# EAGLE board Console_Block-Panel-v10 (EAGLE 6.6.0), part 1 of 4
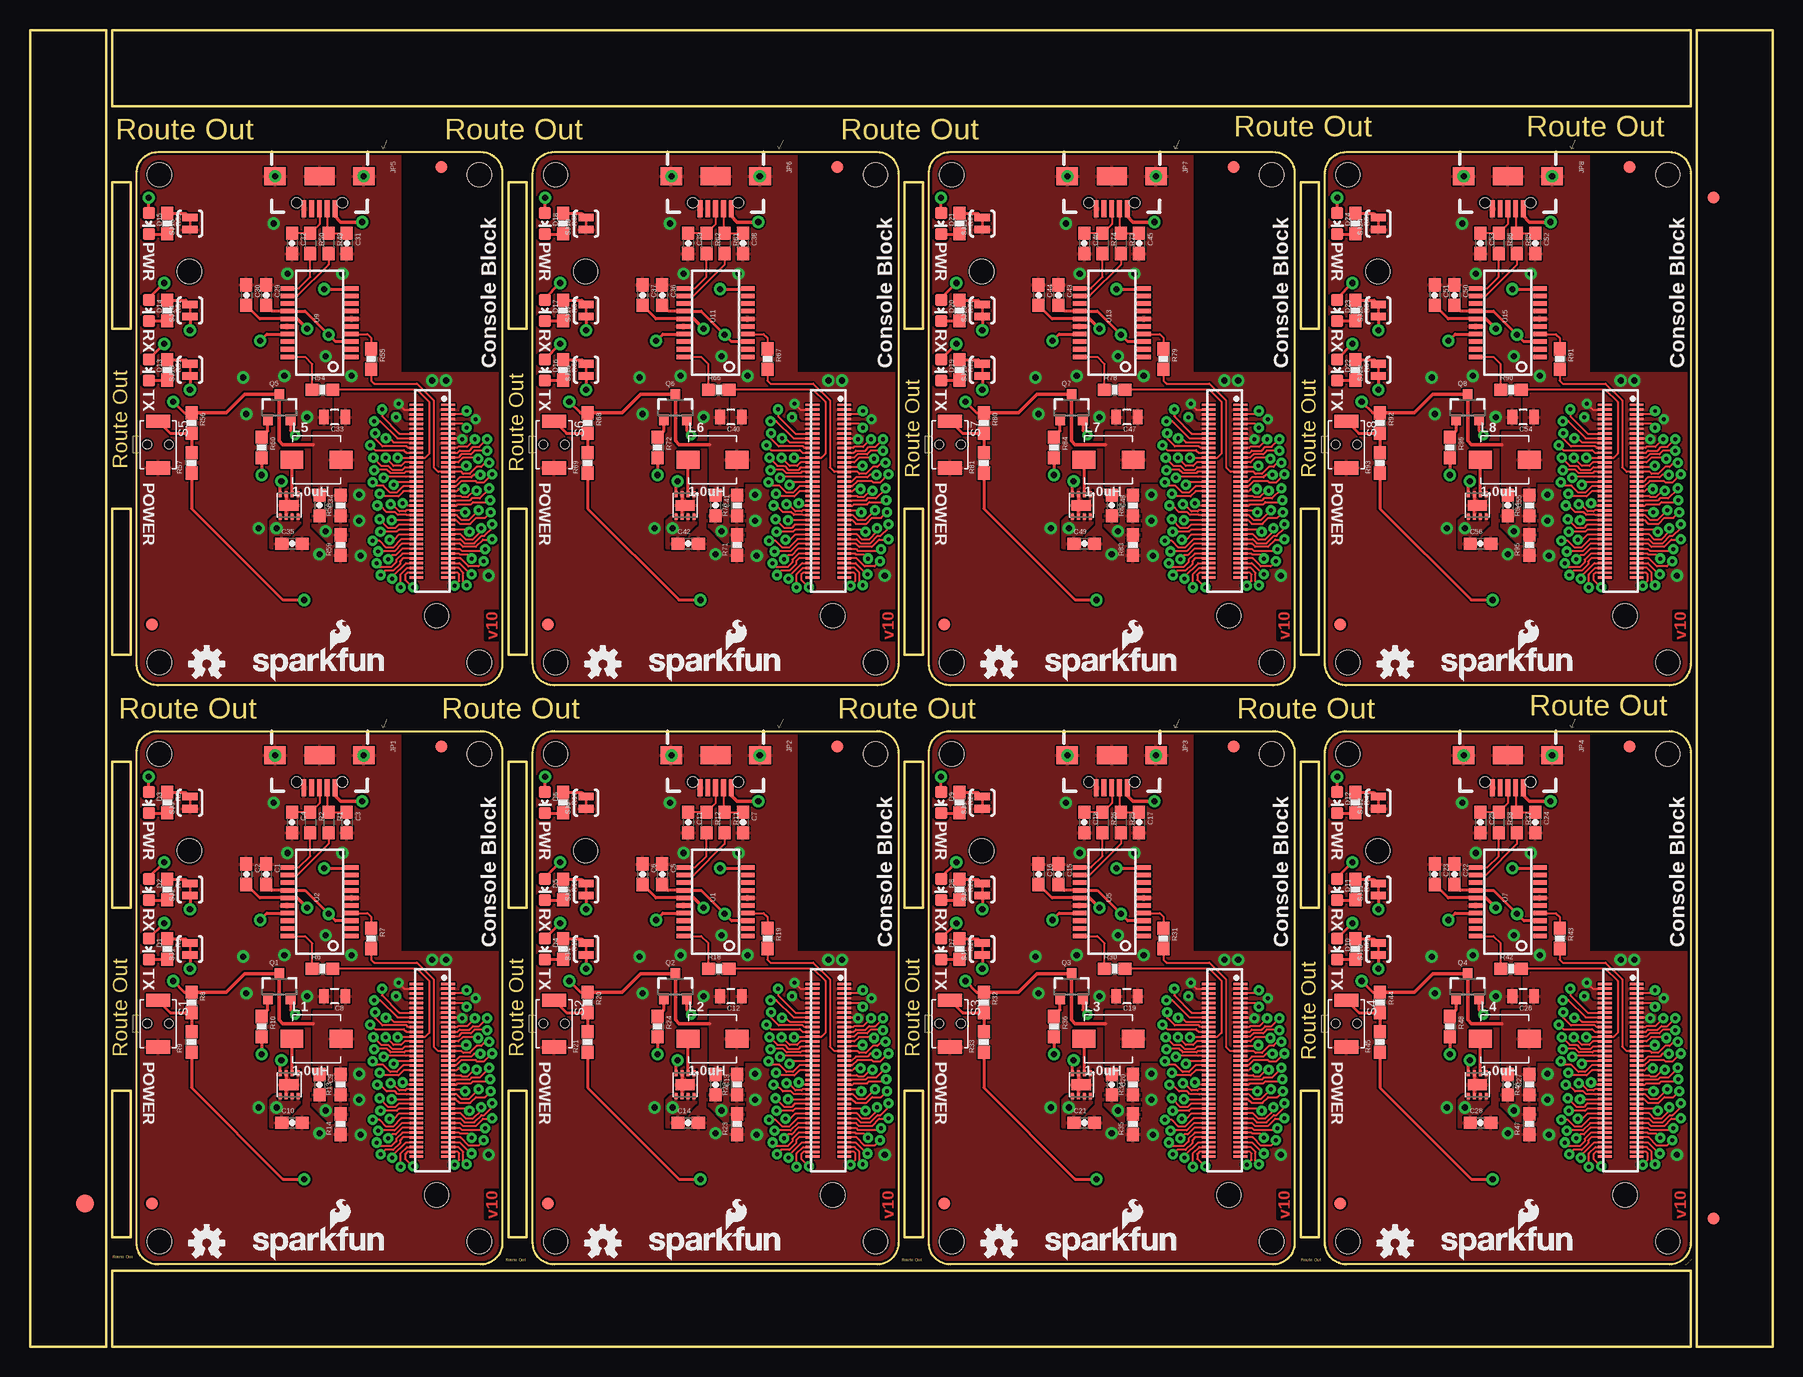
[diagram p0: board, top side]
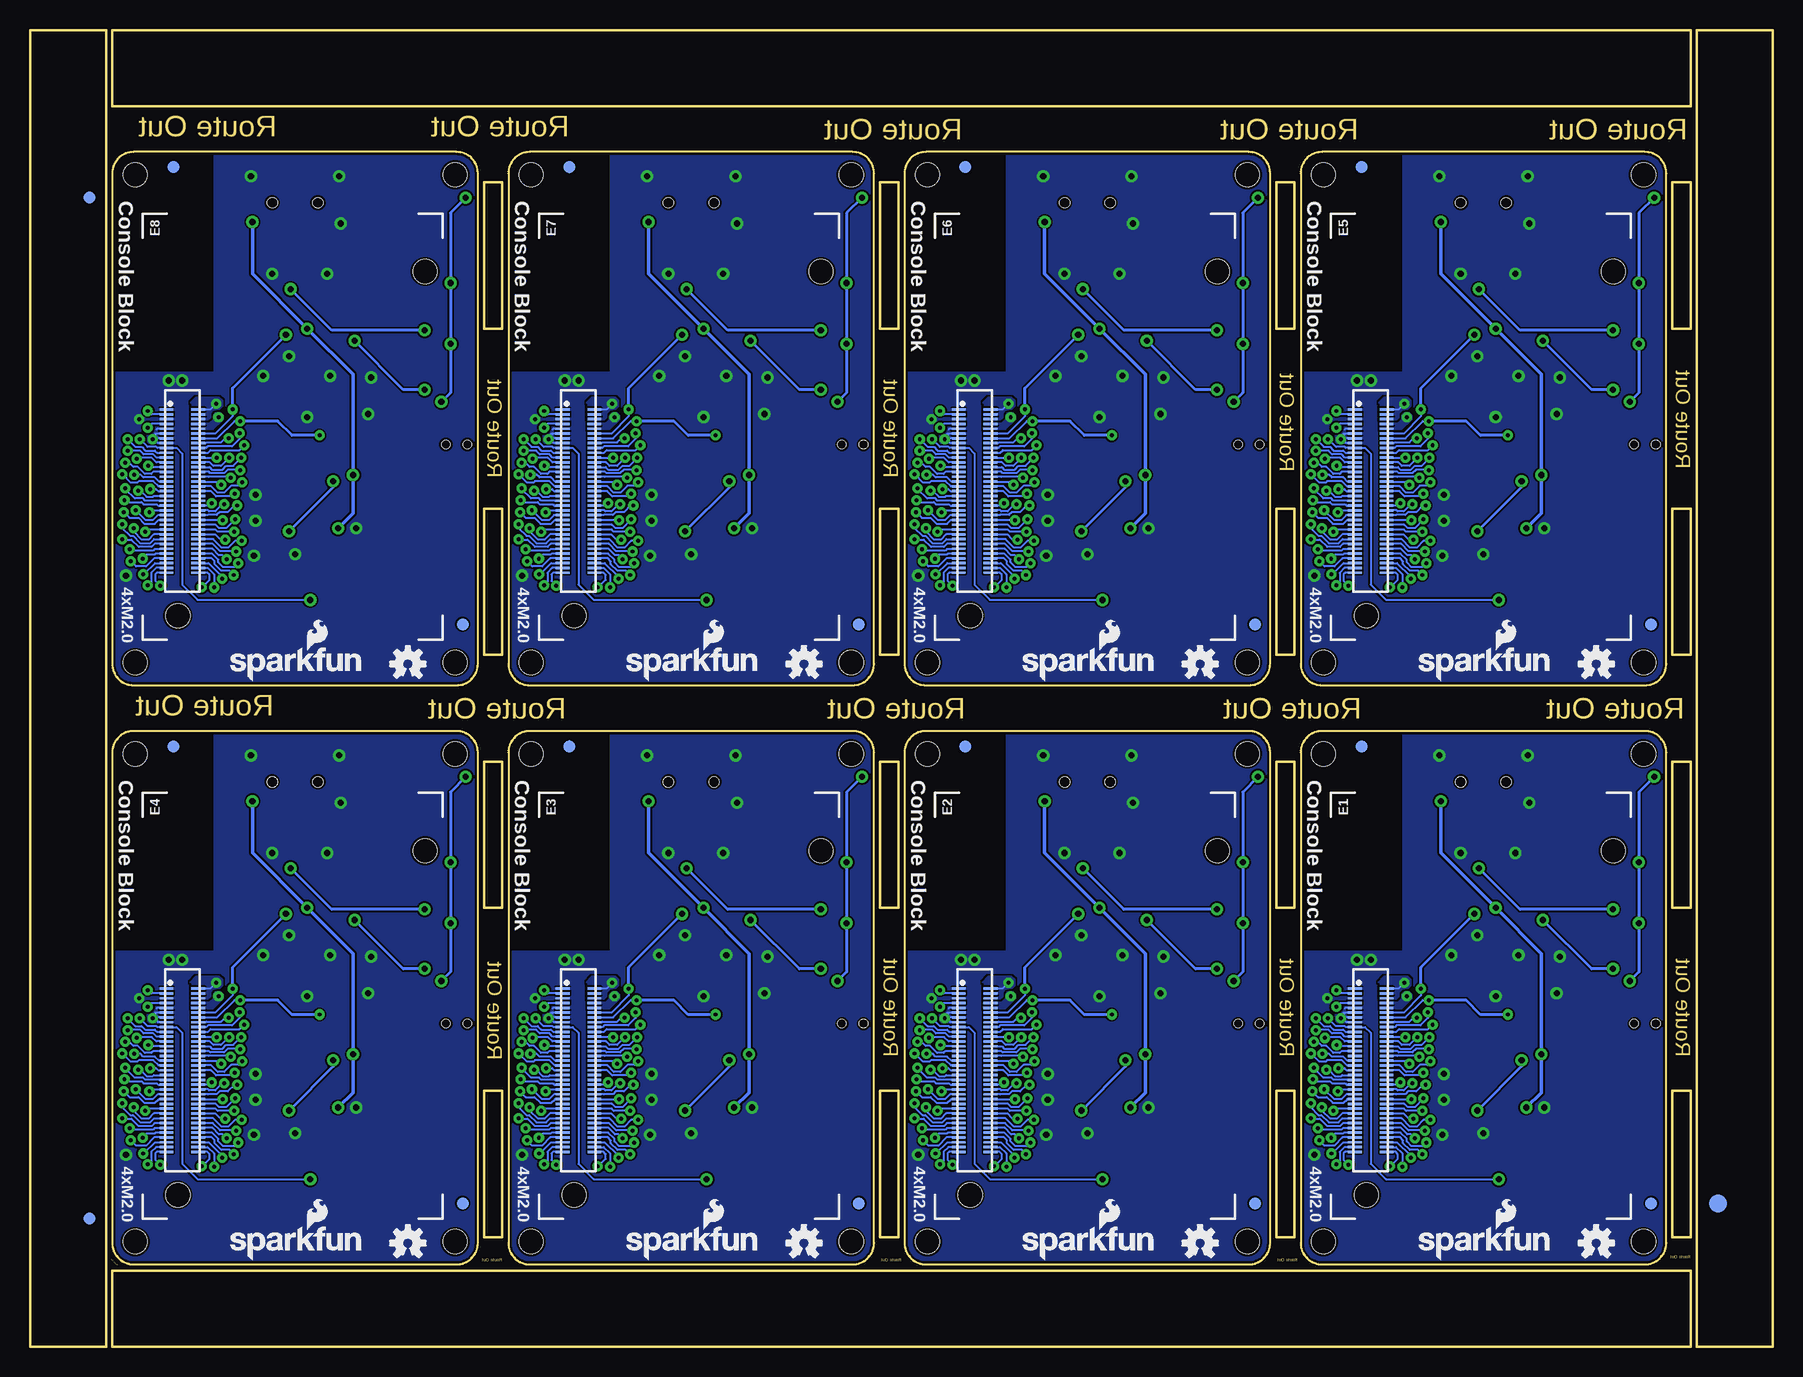
[diagram p1: board, bottom side, seen from below]

Size 145.29 x 109.73 mm. Coordinates in mm from the lower left corner, seen from the top.
Outline: 6.35,79.25 6.35,0 0,0 0,29.72
Outline: 145.29,79.25 145.29,0 138.94,0 138.94,29.72
Outline: 138.94,27.18 138.94,109.73 145.29,109.73 145.29,76.71
Outline: 0,27.18 0,109.73 6.35,109.73 6.35,76.71
Outline: 39.37,49.53 39.37,8.64 arc-90 37.59,6.86 10.67,6.86 arc-90 8.89,8.64 8.89,49.53 arc-90 10.67,51.31 37.59,51.31 arc-90 39.37,49.53
Outline: 72.39,49.53 72.39,8.64 arc-90 70.61,6.86 43.69,6.86 arc-90 41.91,8.64 41.91,49.53 arc-90 43.69,51.31 70.61,51.31 arc-90 72.39,49.53
Outline: 105.41,49.53 105.41,8.64 arc-90 103.63,6.86 76.71,6.86 arc-90 74.93,8.64 74.93,49.53 arc-90 76.71,51.31 103.63,51.31 arc-90 105.41,49.53
Outline: 138.43,49.53 138.43,8.64 arc-90 136.65,6.86 109.73,6.86 arc-90 107.95,8.64 107.95,49.53 arc-90 109.73,51.31 136.65,51.31 arc-90 138.43,49.53
Outline: 39.37,97.79 39.37,56.9 arc-90 37.59,55.12 10.67,55.12 arc-90 8.89,56.9 8.89,97.79 arc-90 10.67,99.57 37.59,99.57 arc-90 39.37,97.79
Outline: 72.39,97.79 72.39,56.9 arc-90 70.61,55.12 43.69,55.12 arc-90 41.91,56.9 41.91,97.79 arc-90 43.69,99.57 70.61,99.57 arc-90 72.39,97.79
Outline: 105.41,97.79 105.41,56.9 arc-90 103.63,55.12 76.71,55.12 arc-90 74.93,56.9 74.93,97.79 arc-90 76.71,99.57 103.63,99.57 arc-90 105.41,97.79
Outline: 138.43,97.79 138.43,56.9 arc-90 136.65,55.12 109.73,55.12 arc-90 107.95,56.9 107.95,97.79 arc-90 109.73,99.57 136.65,99.57 arc-90 138.43,97.79
Outline: 6.86,0 138.43,0 138.43,6.35 6.86,6.35 6.86,0
Outline: 138.43,109.73 6.86,109.73 6.86,103.38 138.43,103.38 138.43,109.73
Outline: 8.38,9.14 8.38,21.34 6.86,21.34 6.86,9.14 8.38,9.14
Outline: 6.86,48.77 6.86,36.58 8.38,36.58 8.38,48.77 6.86,48.77
Outline: 41.4,9.14 41.4,21.34 39.88,21.34 39.88,9.14 41.4,9.14
Outline: 74.42,9.14 74.42,21.34 72.9,21.34 72.9,9.14 74.42,9.14
Outline: 107.44,9.14 107.44,21.34 105.92,21.34 105.92,9.14 107.44,9.14
Outline: 105.92,48.77 105.92,36.58 107.44,36.58 107.44,48.77 105.92,48.77
Outline: 72.9,48.77 72.9,36.58 74.42,36.58 74.42,48.77 72.9,48.77
Outline: 39.88,48.77 39.88,36.58 41.4,36.58 41.4,48.77 39.88,48.77
Outline: 8.38,57.66 8.38,69.85 6.86,69.85 6.86,57.66 8.38,57.66
Outline: 41.4,57.66 41.4,69.85 39.88,69.85 39.88,57.66 41.4,57.66
Outline: 74.42,57.66 74.42,69.85 72.9,69.85 72.9,57.66 74.42,57.66
Outline: 107.44,57.66 107.44,69.85 105.92,69.85 105.92,57.66 107.44,57.66
Outline: 105.92,97.03 105.92,84.84 107.44,84.84 107.44,97.03 105.92,97.03
Outline: 72.9,97.03 72.9,84.84 74.42,84.84 74.42,97.03 72.9,97.03
Outline: 39.88,97.03 39.88,84.84 41.4,84.84 41.4,97.03 39.88,97.03
Outline: 6.86,97.03 6.86,84.84 8.38,84.84 8.38,97.03 6.86,97.03
Copper layers (1*16): Top 0.035mm / dielectric 1.5mm / Bottom 0.035mm
Design rules "SparkFun-2-layer *": minimum track width 6mil, minimum drill 13mil, track to track 6mil, track to pad 6mil, pad to pad 6mil, via to via 6mil, smd to smd 6mil, copper to edge 8mil, drill to drill 8mil, minimum pad ring 12mil, minimum via ring 10mil, stop-mask expansion 4mil, vias tented up to drill 20mil, thermal gap 6mil
Holes 2 mm at 37.47,8.76 10.79,8.76 10.79,49.4 37.47,49.4 70.48,8.76 43.81,8.76 43.81,49.4 70.48,49.4 103.5,8.76 76.83,8.76 76.83,49.4 103.5,49.4 136.53,8.76 109.86,8.76 109.86,49.4 136.53,49.4 37.47,57.02 10.79,57.02 10.79,97.66 37.47,97.66 70.48,57.02 43.81,57.02 43.81,97.66 70.48,97.66 103.5,57.02 76.83,57.02 76.83,97.66 103.5,97.66 136.53,57.02 109.86,57.02 109.86,97.66 136.53,97.66
tRestrict: area 31,33 to 39.4,51.3; area 64,33 to 72.4,51.3; area 97,33 to 105.4,51.3; area 130,33 to 138.4,51.3; area 31,81.3 to 39.4,99.6; area 64,81.3 to 72.4,99.6; area 97,81.3 to 105.4,99.6; area 130,81.3 to 138.4,99.6; 32 lines
bRestrict: area 31,33 to 39.4,51.3; area 64,33 to 72.4,51.3; area 97,33 to 105.4,51.3; area 130,33 to 138.4,51.3; area 31,81.3 to 39.4,99.6; area 64,81.3 to 72.4,99.6; area 97,81.3 to 105.4,99.6; area 130,81.3 to 138.4,99.6; 16 lines

## Footprints (pad centres in the part's own frame; a part is rotated, then mirrored left to right if it is on the bottom)
0603-CAP = smd 1.1 x 1: 1 -0.85,0; 2 0.85,0
0805 = smd 0.8 x 1.2: 1 -0.9,0; 2 0.9,0
LED-0603 = smd 1 x 1: A 0,-0.877; C 0,0.877
EDISON_DAUGHTER = smd 1.14 x 0.2: 1 1.98,19.17; 2 4.62,19.17; 3 1.98,18.77; 4 4.62,18.77; 5 1.98,18.37; 6 4.62,18.37; 7 1.98,17.97; 8 4.62,17.97; 9 1.98,17.57; 10 4.62,17.57; 11 1.98,17.17; 12 4.62,17.17; 13 1.98,16.77; 14 4.62,16.77; 15 1.98,16.37; 16 4.62,16.37; 17 1.98,15.97; 18 4.62,15.97; 19 1.98,15.57; 20 4.62,15.57; 21 1.98,15.17; 22 4.62,15.17; 23 1.98,14.77; 24 4.62,14.77; 25 1.98,14.37; 26 4.62,14.37; 27 1.98,13.97; 28 4.62,13.97; 29 1.98,13.57; 30 4.62,13.57; 31 1.98,13.17; 32 4.62,13.17; 33 1.98,12.77; 34 4.62,12.77; 35 1.98,12.37; 36 4.62,12.37; 37 1.98,11.97; 38 4.62,11.97; 39 1.98,11.57; 40 4.62,11.57; 41 1.98,11.17; 42 4.62,11.17; 43 1.98,10.77; 44 4.62,10.77; 45 1.98,10.37; 46 4.62,10.37; 47 1.98,9.97; 48 4.62,9.97; 49 1.98,9.57; 50 4.62,9.57; 51 1.98,9.17; 52 4.62,9.17; 53 1.98,8.77; 54 4.62,8.77; 55 1.98,8.37; 56 4.62,8.37; 57 1.98,7.97; 58 4.62,7.97; 59 1.98,7.57; 60 4.62,7.57; 61 1.98,7.17; 62 4.62,7.17; 63 1.98,6.77; 64 4.62,6.77; 65 1.98,6.37; 66 4.62,6.37; 67 1.98,5.97; 68 4.62,5.97; 69 1.98,5.57; 70 4.62,5.57 | hole 2: 23.53,30.67; 2.93,1.98
FIDUCIAL-1.5X3 = smd 1.5 x 1.5: 1 0,0
FIDUCIAL-1X2 = smd 1 x 1: 1 0,0
USB-B-MICRO-SMD_V03 = smd 1.4 x 0.4: D+1 2.7,0; D-1 2.7,0.65; GND1 2.7,-1.3; ID1 2.7,-0.65; VBUS1 2.7,1.3 | smd 1.5 x 1.8: SHIELD1 0,3.7; SHIELD2 0,-3.7 | smd 1.5 x 2.5: SHIELD3 0,0 | hole 0.85: 2.2,1.9; 2.2,-1.9
INDUCTOR-SRP4020 = smd 1.9 x 1.5: P$1 -2.05,0; P$2 2.05,0
SOT23-3 = smd 0.8 x 0.9: 1 -0.95,-1; 2 0.95,-1; 3 0,1.1
0603 = smd 1.1 x 1: 1 -0.85,0; 2 0.85,0
0603-RES = smd 1.1 x 1: 1 -0.85,0; 2 0.85,0
TACTILE_SWITCH-SMD-RIGHT-ANGLE = smd 1.1 x 2: 1 -1.95,0; 2 1.95,0 | hole 0.7: 0,0.9; 0,-0.9
PAD-JUMPER-2-NC_BY_TRACE_YES_SILK = smd 0.635 x 1.27: 1 -0.508,0; 2 0.508,0
SSOP20_L = smd 0.381 x 1.143: 1 -2.857,-2.68; 2 -2.223,-2.68; 3 -1.587,-2.68; 4 -0.953,-2.68; 5 -0.318,-2.68; 6 0.318,-2.68; 7 0.953,-2.68; 8 1.587,-2.68; 9 2.223,-2.68; 10 2.857,-2.68; 11 2.857,2.68; 12 2.223,2.68; 13 1.587,2.68; 14 0.953,2.68; 15 0.318,2.68; 16 -0.318,2.68; 17 -0.953,2.68; 18 -1.587,2.68; 19 -2.223,2.68; 20 -2.857,2.68
WSON-8-PAD = smd 0.25 x 0.5: 1 -0.75,-0.95; 2 -0.25,-0.95; 3 0.25,-0.95; 4 0.75,-0.95; 5 0.75,0.95; 6 0.25,0.95; 7 -0.25,0.95; 8 -0.75,0.95 | smd 1.6 x 0.9: PAD 0,0
DF40C-70DP-0.4(51) = smd 0.2 x 1.14 bottom: 1 6.8,1.32; 2 6.8,-1.32; 3 6.4,1.32; 4 6.4,-1.32; 5 6,1.32; 6 6,-1.32; 7 5.6,1.32; 8 5.6,-1.32; 9 5.2,1.32; 10 5.2,-1.32; 11 4.8,1.32; 12 4.8,-1.32; 13 4.4,1.32; 14 4.4,-1.32; 15 4,1.32; 16 4,-1.32; 17 3.6,1.32; 18 3.6,-1.32; 19 3.2,1.32; 20 3.2,-1.32; 21 2.8,1.32; 22 2.8,-1.32; 23 2.4,1.32; 24 2.4,-1.32; 25 2,1.32; 26 2,-1.32; 27 1.6,1.32; 28 1.6,-1.32; 29 1.2,1.32; 30 1.2,-1.32; 31 0.8,1.32; 32 0.8,-1.32; 33 0.4,1.32; 34 0.4,-1.32; 35 0,1.32; 36 0,-1.32; 37 -0.4,1.32; 38 -0.4,-1.32; 39 -0.8,1.32; 40 -0.8,-1.32; 41 -1.2,1.32; 42 -1.2,-1.32; 43 -1.6,1.32; 44 -1.6,-1.32; 45 -2,1.32; 46 -2,-1.32; 47 -2.4,1.32; 48 -2.4,-1.32; 49 -2.8,1.32; 50 -2.8,-1.32; 51 -3.2,1.32; 52 -3.2,-1.32; 53 -3.6,1.32; 54 -3.6,-1.32; 55 -4,1.32; 56 -4,-1.32; 57 -4.4,1.32; 58 -4.4,-1.32; 59 -4.8,1.32; 60 -4.8,-1.32; 61 -5.2,1.32; 62 -5.2,-1.32; 63 -5.6,1.32; 64 -5.6,-1.32; 65 -6,1.32; 66 -6,-1.32; 67 -6.4,1.32; 68 -6.4,-1.32; 69 -6.8,1.32; 70 -6.8,-1.32; NC1 7.2,1.32; NC2 7.2,-1.32; NC3 -7.2,-1.32; NC4 -7.2,1.32

## Placement (x,y rotation side)
C1  0.1uF  [0603-CAP]  19.68,39.37 270 top
C2  0.1uF  [0603-CAP]  18.03,39.37 270 top
C3  47pF  [0603-CAP]  26.42,43.69 270 top
C4  47pF  [0603-CAP]  21.84,43.69 270 top
C5  0.1uF  [0603-CAP]  52.7,39.37 270 top
C6  0.1uF  [0603-CAP]  51.05,39.37 270 top
C7  47pF  [0603-CAP]  59.44,43.69 270 top
C8  22uF  [0805]  25.4,29.21 180 top
C9  47pF  [0603-CAP]  24.13,21.84 270 top
C10  4.7uF  [0603-CAP]  21.84,18.67 0 top
C11  47pF  [0603-CAP]  54.86,43.69 270 top
C12  22uF  [0805]  58.42,29.21 180 top
C13  47pF  [0603-CAP]  57.15,21.84 270 top
C14  4.7uF  [0603-CAP]  54.86,18.67 0 top
C15  0.1uF  [0603-CAP]  85.72,39.37 270 top
C16  0.1uF  [0603-CAP]  84.07,39.37 270 top
C17  47pF  [0603-CAP]  92.46,43.69 270 top
C18  47pF  [0603-CAP]  87.88,43.69 270 top
C19  22uF  [0805]  91.44,29.21 180 top
C20  47pF  [0603-CAP]  90.17,21.84 270 top
C21  4.7uF  [0603-CAP]  87.88,18.67 0 top
C22  0.1uF  [0603-CAP]  118.75,39.37 270 top
C23  0.1uF  [0603-CAP]  117.09,39.37 270 top
C24  47pF  [0603-CAP]  125.48,43.69 270 top
C25  47pF  [0603-CAP]  120.9,43.69 270 top
C26  22uF  [0805]  124.46,29.21 180 top
C27  47pF  [0603-CAP]  123.19,21.84 270 top
C28  4.7uF  [0603-CAP]  120.9,18.67 0 top
C29  0.1uF  [0603-CAP]  19.68,87.63 270 top
C30  0.1uF  [0603-CAP]  18.03,87.63 270 top
C31  47pF  [0603-CAP]  26.42,91.95 270 top
C32  47pF  [0603-CAP]  21.84,91.95 270 top
C33  22uF  [0805]  25.4,77.47 180 top
C34  47pF  [0603-CAP]  24.13,70.1 270 top
C35  4.7uF  [0603-CAP]  21.84,66.93 0 top
C36  0.1uF  [0603-CAP]  52.7,87.63 270 top
C37  0.1uF  [0603-CAP]  51.05,87.63 270 top
C38  47pF  [0603-CAP]  59.44,91.95 270 top
C39  47pF  [0603-CAP]  54.86,91.95 270 top
C40  22uF  [0805]  58.42,77.47 180 top
C41  47pF  [0603-CAP]  57.15,70.1 270 top
C42  4.7uF  [0603-CAP]  54.86,66.93 0 top
C43  0.1uF  [0603-CAP]  85.72,87.63 270 top
C44  0.1uF  [0603-CAP]  84.07,87.63 270 top
C45  47pF  [0603-CAP]  92.46,91.95 270 top
C46  47pF  [0603-CAP]  87.88,91.95 270 top
C47  22uF  [0805]  91.44,77.47 180 top
C48  47pF  [0603-CAP]  90.17,70.1 270 top
C49  4.7uF  [0603-CAP]  87.88,66.93 0 top
C50  0.1uF  [0603-CAP]  118.75,87.63 270 top
C51  0.1uF  [0603-CAP]  117.09,87.63 270 top
C52  47pF  [0603-CAP]  125.48,91.95 270 top
C53  47pF  [0603-CAP]  120.9,91.95 270 top
C54  22uF  [0805]  124.46,77.47 180 top
C55  47pF  [0603-CAP]  123.19,70.1 270 top
C56  4.7uF  [0603-CAP]  120.9,66.93 0 top
D1  RED  [LED-0603]  9.91,33.15 180 top
D2  YELLOW  [LED-0603]  9.91,38.1 180 top
D3  BLUE  [LED-0603]  9.91,45.34 180 top
D4  RED  [LED-0603]  42.93,33.15 180 top
D5  YELLOW  [LED-0603]  42.93,38.1 180 top
D6  BLUE  [LED-0603]  42.93,45.34 180 top
D7  RED  [LED-0603]  75.95,33.15 180 top
D8  YELLOW  [LED-0603]  75.95,38.1 180 top
D9  BLUE  [LED-0603]  75.95,45.34 180 top
D10  RED  [LED-0603]  108.97,33.15 180 top
D11  YELLOW  [LED-0603]  108.97,38.1 180 top
D12  BLUE  [LED-0603]  108.97,45.34 180 top
D13  RED  [LED-0603]  9.91,81.41 180 top
D14  YELLOW  [LED-0603]  9.91,86.36 180 top
D15  BLUE  [LED-0603]  9.91,93.6 180 top
D16  RED  [LED-0603]  42.93,81.41 180 top
D17  YELLOW  [LED-0603]  42.93,86.36 180 top
D18  BLUE  [LED-0603]  42.93,93.6 180 top
D19  RED  [LED-0603]  75.95,81.41 180 top
D20  YELLOW  [LED-0603]  75.95,86.36 180 top
D21  BLUE  [LED-0603]  75.95,93.6 180 top
D22  RED  [LED-0603]  108.97,81.41 180 top
D23  YELLOW  [LED-0603]  108.97,86.36 180 top
D24  BLUE  [LED-0603]  108.97,93.6 180 top
E1  EDISON_CONNECTOR_FULLMOUNTING_HOLES  [EDISON_DAUGHTER]  36.83,10.67 0 bottom
E2  EDISON_CONNECTOR_FULLMOUNTING_HOLES  [EDISON_DAUGHTER]  69.85,10.67 0 bottom
E3  EDISON_CONNECTOR_FULLMOUNTING_HOLES  [EDISON_DAUGHTER]  102.87,10.67 0 bottom
E4  EDISON_CONNECTOR_FULLMOUNTING_HOLES  [EDISON_DAUGHTER]  135.89,10.67 0 bottom
E5  EDISON_CONNECTOR_FULLMOUNTING_HOLES  [EDISON_DAUGHTER]  36.83,58.93 0 bottom
E6  EDISON_CONNECTOR_FULLMOUNTING_HOLES  [EDISON_DAUGHTER]  69.85,58.93 0 bottom
E7  EDISON_CONNECTOR_FULLMOUNTING_HOLES  [EDISON_DAUGHTER]  102.87,58.93 0 bottom
E8  EDISON_CONNECTOR_FULLMOUNTING_HOLES  [EDISON_DAUGHTER]  135.89,58.93 0 bottom
E$1  [FIDUCIAL-1.5X3]  4.57,11.94 0 top
E$2  [FIDUCIAL-1.5X3]  4.57,11.94 0 bottom
E$3  [FIDUCIAL-1X2]  140.34,10.67 0 bottom
E$4  [FIDUCIAL-1X2]  140.34,10.67 0 top
E$5  [FIDUCIAL-1X2]  140.34,95.76 180 top
E$6  [FIDUCIAL-1X2]  140.34,95.76 180 bottom
FID1  FIDUCIAL1X2  [FIDUCIAL-1X2]  10.16,11.94 0 top
FID2  FIDUCIAL1X2  [FIDUCIAL-1X2]  34.29,50.04 0 top
FID3  FIDUCIAL1X2  [FIDUCIAL-1X2]  10.16,11.94 0 bottom
FID4  FIDUCIAL1X2  [FIDUCIAL-1X2]  34.29,50.04 0 bottom
FID5  FIDUCIAL1X2  [FIDUCIAL-1X2]  43.18,11.94 0 top
FID6  FIDUCIAL1X2  [FIDUCIAL-1X2]  67.31,50.04 0 top
FID7  FIDUCIAL1X2  [FIDUCIAL-1X2]  43.18,11.94 0 bottom
FID8  FIDUCIAL1X2  [FIDUCIAL-1X2]  67.31,50.04 0 bottom
FID9  FIDUCIAL1X2  [FIDUCIAL-1X2]  76.2,11.94 0 top
FID10  FIDUCIAL1X2  [FIDUCIAL-1X2]  100.33,50.04 0 top
FID11  FIDUCIAL1X2  [FIDUCIAL-1X2]  76.2,11.94 0 bottom
FID12  FIDUCIAL1X2  [FIDUCIAL-1X2]  100.33,50.04 0 bottom
FID13  FIDUCIAL1X2  [FIDUCIAL-1X2]  109.22,11.94 0 top
FID14  FIDUCIAL1X2  [FIDUCIAL-1X2]  133.35,50.04 0 top
FID15  FIDUCIAL1X2  [FIDUCIAL-1X2]  109.22,11.94 0 bottom
FID16  FIDUCIAL1X2  [FIDUCIAL-1X2]  133.35,50.04 0 bottom
FID17  FIDUCIAL1X2  [FIDUCIAL-1X2]  10.16,60.2 0 top
FID18  FIDUCIAL1X2  [FIDUCIAL-1X2]  34.29,98.3 0 top
FID19  FIDUCIAL1X2  [FIDUCIAL-1X2]  10.16,60.2 0 bottom
FID20  FIDUCIAL1X2  [FIDUCIAL-1X2]  34.29,98.3 0 bottom
FID21  FIDUCIAL1X2  [FIDUCIAL-1X2]  43.18,60.2 0 top
FID22  FIDUCIAL1X2  [FIDUCIAL-1X2]  67.31,98.3 0 top
FID23  FIDUCIAL1X2  [FIDUCIAL-1X2]  43.18,60.2 0 bottom
FID24  FIDUCIAL1X2  [FIDUCIAL-1X2]  67.31,98.3 0 bottom
FID25  FIDUCIAL1X2  [FIDUCIAL-1X2]  76.2,60.2 0 top
FID26  FIDUCIAL1X2  [FIDUCIAL-1X2]  100.33,98.3 0 top
FID27  FIDUCIAL1X2  [FIDUCIAL-1X2]  76.2,60.2 0 bottom
FID28  FIDUCIAL1X2  [FIDUCIAL-1X2]  100.33,98.3 0 bottom
FID29  FIDUCIAL1X2  [FIDUCIAL-1X2]  109.22,60.2 0 top
FID30  FIDUCIAL1X2  [FIDUCIAL-1X2]  133.35,98.3 0 top
FID31  FIDUCIAL1X2  [FIDUCIAL-1X2]  109.22,60.2 0 bottom
FID32  FIDUCIAL1X2  [FIDUCIAL-1X2]  133.35,98.3 0 bottom
JP1  USB_MICROB  [USB-B-MICRO-SMD_V03]  24.13,49.28 270 top
JP2  USB_MICROB  [USB-B-MICRO-SMD_V03]  57.15,49.28 270 top
JP3  USB_MICROB  [USB-B-MICRO-SMD_V03]  90.17,49.28 270 top
JP4  USB_MICROB  [USB-B-MICRO-SMD_V03]  123.19,49.28 270 top
JP5  USB_MICROB  [USB-B-MICRO-SMD_V03]  24.13,97.54 270 top
JP6  USB_MICROB  [USB-B-MICRO-SMD_V03]  57.15,97.54 270 top
JP7  USB_MICROB  [USB-B-MICRO-SMD_V03]  90.17,97.54 270 top
JP8  USB_MICROB  [USB-B-MICRO-SMD_V03]  123.19,97.54 270 top
L1  1.0uH  [INDUCTOR-SRP4020]  23.88,25.65 0 top
L2  1.0uH  [INDUCTOR-SRP4020]  56.9,25.65 0 top
L3  1.0uH  [INDUCTOR-SRP4020]  89.92,25.65 0 top
L4  1.0uH  [INDUCTOR-SRP4020]  122.94,25.65 0 top
L5  1.0uH  [INDUCTOR-SRP4020]  23.88,73.91 0 top
L6  1.0uH  [INDUCTOR-SRP4020]  56.9,73.91 0 top
L7  1.0uH  [INDUCTOR-SRP4020]  89.92,73.91 0 top
L8  1.0uH  [INDUCTOR-SRP4020]  122.94,73.91 0 top
LOGO1  SFE_LOGO_NAME_FLAME.1_INCH  [SFE_LOGO_NAME_FLAME_.1]  18.16,7.11 0 top
LOGO2  OSHW-LOGOS  [OSHW-LOGO-S]  14.73,8.64 0 bottom
LOGO3  SFE_LOGO_NAME_FLAME.1_INCH  [SFE_LOGO_NAME_FLAME_.1]  29.97,7.11 0 bottom
LOGO4  OSHW-LOGOS  [OSHW-LOGO-S]  14.73,8.64 0 top
LOGO5  OSHW-LOGOS  [OSHW-LOGO-S]  47.75,8.64 0 bottom
LOGO6  SFE_LOGO_NAME_FLAME.1_INCH  [SFE_LOGO_NAME_FLAME_.1]  62.99,7.11 0 bottom
LOGO7  SFE_LOGO_NAME_FLAME.1_INCH  [SFE_LOGO_NAME_FLAME_.1]  51.18,7.11 0 top
LOGO8  OSHW-LOGOS  [OSHW-LOGO-S]  47.75,8.64 0 top
LOGO9  OSHW-LOGOS  [OSHW-LOGO-S]  80.77,8.64 0 bottom
LOGO10  SFE_LOGO_NAME_FLAME.1_INCH  [SFE_LOGO_NAME_FLAME_.1]  96.01,7.11 0 bottom
LOGO11  SFE_LOGO_NAME_FLAME.1_INCH  [SFE_LOGO_NAME_FLAME_.1]  84.2,7.11 0 top
LOGO12  OSHW-LOGOS  [OSHW-LOGO-S]  80.77,8.64 0 top
LOGO13  OSHW-LOGOS  [OSHW-LOGO-S]  113.79,8.64 0 bottom
LOGO14  SFE_LOGO_NAME_FLAME.1_INCH  [SFE_LOGO_NAME_FLAME_.1]  129.03,7.11 0 bottom
LOGO15  SFE_LOGO_NAME_FLAME.1_INCH  [SFE_LOGO_NAME_FLAME_.1]  117.22,7.11 0 top
LOGO16  OSHW-LOGOS  [OSHW-LOGO-S]  113.79,8.64 0 top
LOGO17  OSHW-LOGOS  [OSHW-LOGO-S]  14.73,56.9 0 bottom
LOGO18  SFE_LOGO_NAME_FLAME.1_INCH  [SFE_LOGO_NAME_FLAME_.1]  29.97,55.37 0 bottom
LOGO19  SFE_LOGO_NAME_FLAME.1_INCH  [SFE_LOGO_NAME_FLAME_.1]  18.16,55.37 0 top
LOGO20  OSHW-LOGOS  [OSHW-LOGO-S]  14.73,56.9 0 top
LOGO21  OSHW-LOGOS  [OSHW-LOGO-S]  47.75,56.9 0 bottom
LOGO22  SFE_LOGO_NAME_FLAME.1_INCH  [SFE_LOGO_NAME_FLAME_.1]  62.99,55.37 0 bottom
LOGO23  SFE_LOGO_NAME_FLAME.1_INCH  [SFE_LOGO_NAME_FLAME_.1]  51.18,55.37 0 top
LOGO24  OSHW-LOGOS  [OSHW-LOGO-S]  47.75,56.9 0 top
LOGO25  OSHW-LOGOS  [OSHW-LOGO-S]  80.77,56.9 0 bottom
LOGO26  SFE_LOGO_NAME_FLAME.1_INCH  [SFE_LOGO_NAME_FLAME_.1]  96.01,55.37 0 bottom
LOGO27  SFE_LOGO_NAME_FLAME.1_INCH  [SFE_LOGO_NAME_FLAME_.1]  84.2,55.37 0 top
LOGO28  OSHW-LOGOS  [OSHW-LOGO-S]  80.77,56.9 0 top
LOGO29  OSHW-LOGOS  [OSHW-LOGO-S]  113.79,56.9 0 bottom
LOGO30  SFE_LOGO_NAME_FLAME.1_INCH  [SFE_LOGO_NAME_FLAME_.1]  129.03,55.37 0 bottom
LOGO31  SFE_LOGO_NAME_FLAME.1_INCH  [SFE_LOGO_NAME_FLAME_.1]  117.22,55.37 0 top
LOGO32  OSHW-LOGOS  [OSHW-LOGO-S]  113.79,56.9 0 top
Q1  BSS138  [SOT23-3]  20.78,30 0 top
Q2  BSS138  [SOT23-3]  53.8,30 0 top
Q3  BSS138  [SOT23-3]  86.82,30 0 top
Q4  BSS138  [SOT23-3]  119.84,30 0 top
Q5  BSS138  [SOT23-3]  20.78,78.26 0 top
Q6  BSS138  [SOT23-3]  53.8,78.26 0 top
Q7  BSS138  [SOT23-3]  86.82,78.26 0 top
Q8  BSS138  [SOT23-3]  119.84,78.26 0 top
R1  27  [0603]  24.89,43.69 270 top
R2  27  [0603]  23.37,43.69 270 top
R3  1K  [0603-RES]  11.43,33.15 270 top
R4  1K  [0603-RES]  11.43,38.1 270 top
R5  1K  [0603-RES]  11.43,45.34 270 top
R6  100  [0603-RES]  24.38,31.5 0 top
R7  100  [0603-RES]  28.45,34.04 270 top
R8  10K  [0603-RES]  13.46,28.7 270 top
R9  22  [0603-RES]  13.46,25.4 90 top
R10  1K  [0603-RES]  19.3,26.67 270 top
R11  27  [0603]  57.91,43.69 270 top
R12  27  [0603]  56.39,43.69 270 top
R13  680k  [0603-RES]  25.91,21.84 90 top
R14  120k  [0603-RES]  25.91,18.54 90 top
R15  1K  [0603-RES]  44.45,33.15 270 top
R16  1K  [0603-RES]  44.45,38.1 270 top
R17  1K  [0603-RES]  44.45,45.34 270 top
R18  100  [0603-RES]  57.4,31.5 0 top
R19  100  [0603-RES]  61.47,34.04 270 top
R20  10K  [0603-RES]  46.48,28.7 270 top
R21  22  [0603-RES]  46.48,25.4 90 top
R22  680k  [0603-RES]  58.93,21.84 90 top
R23  120k  [0603-RES]  58.93,18.54 90 top
R24  1K  [0603-RES]  52.32,26.67 270 top
R25  27  [0603]  90.93,43.69 270 top
R26  27  [0603]  89.41,43.69 270 top
R27  1K  [0603-RES]  77.47,33.15 270 top
R28  1K  [0603-RES]  77.47,38.1 270 top
R29  1K  [0603-RES]  77.47,45.34 270 top
R30  100  [0603-RES]  90.42,31.5 0 top
R31  100  [0603-RES]  94.49,34.04 270 top
R32  10K  [0603-RES]  79.5,28.7 270 top
R33  22  [0603-RES]  79.5,25.4 90 top
R34  680k  [0603-RES]  91.95,21.84 90 top
R35  120k  [0603-RES]  91.95,18.54 90 top
R36  1K  [0603-RES]  85.34,26.67 270 top
R37  27  [0603]  123.95,43.69 270 top
R38  27  [0603]  122.43,43.69 270 top
R39  1K  [0603-RES]  110.49,33.15 270 top
R40  1K  [0603-RES]  110.49,38.1 270 top
R41  1K  [0603-RES]  110.49,45.34 270 top
R42  100  [0603-RES]  123.44,31.5 0 top
R43  100  [0603-RES]  127.51,34.04 270 top
R44  10K  [0603-RES]  112.52,28.7 270 top
R45  22  [0603-RES]  112.52,25.4 90 top
R46  680k  [0603-RES]  124.97,21.84 90 top
R47  120k  [0603-RES]  124.97,18.54 90 top
R48  1K  [0603-RES]  118.36,26.67 270 top
R49  27  [0603]  24.89,91.95 270 top
R50  27  [0603]  23.37,91.95 270 top
R51  1K  [0603-RES]  11.43,81.41 270 top
R52  1K  [0603-RES]  11.43,86.36 270 top
R53  1K  [0603-RES]  11.43,93.6 270 top
R54  100  [0603-RES]  24.38,79.76 0 top
R55  100  [0603-RES]  28.45,82.3 270 top
R56  10K  [0603-RES]  13.46,76.96 270 top
R57  22  [0603-RES]  13.46,73.66 90 top
R58  680k  [0603-RES]  25.91,70.1 90 top
R59  120k  [0603-RES]  25.91,66.8 90 top
R60  1K  [0603-RES]  19.3,74.93 270 top
R61  27  [0603]  57.91,91.95 270 top
R62  27  [0603]  56.39,91.95 270 top
R63  1K  [0603-RES]  44.45,81.41 270 top
R64  1K  [0603-RES]  44.45,86.36 270 top
R65  1K  [0603-RES]  44.45,93.6 270 top
R66  100  [0603-RES]  57.4,79.76 0 top
R67  100  [0603-RES]  61.47,82.3 270 top
R68  10K  [0603-RES]  46.48,76.96 270 top
R69  22  [0603-RES]  46.48,73.66 90 top
R70  680k  [0603-RES]  58.93,70.1 90 top
R71  120k  [0603-RES]  58.93,66.8 90 top
R72  1K  [0603-RES]  52.32,74.93 270 top
R73  27  [0603]  90.93,91.95 270 top
R74  27  [0603]  89.41,91.95 270 top
R75  1K  [0603-RES]  77.47,81.41 270 top
R76  1K  [0603-RES]  77.47,86.36 270 top
R77  1K  [0603-RES]  77.47,93.6 270 top
R78  100  [0603-RES]  90.42,79.76 0 top
R79  100  [0603-RES]  94.49,82.3 270 top
R80  10K  [0603-RES]  79.5,76.96 270 top
R81  22  [0603-RES]  79.5,73.66 90 top
R82  680k  [0603-RES]  91.95,70.1 90 top
R83  120k  [0603-RES]  91.95,66.8 90 top
R84  1K  [0603-RES]  85.34,74.93 270 top
R85  27  [0603]  123.95,91.95 270 top
R86  27  [0603]  122.43,91.95 270 top
R87  1K  [0603-RES]  110.49,81.41 270 top
R88  1K  [0603-RES]  110.49,86.36 270 top
R89  1K  [0603-RES]  110.49,93.6 270 top
R90  100  [0603-RES]  123.44,79.76 0 top
R91  100  [0603-RES]  127.51,82.3 270 top
R92  10K  [0603-RES]  112.52,76.96 270 top
R93  22  [0603-RES]  112.52,73.66 90 top
R94  680k  [0603-RES]  124.97,70.1 90 top
R95  120k  [0603-RES]  124.97,66.8 90 top
R96  1K  [0603-RES]  118.36,74.93 270 top
S1  POWER  [TACTILE_SWITCH-SMD-RIGHT-ANGLE]  10.67,26.92 270 top
S2  POWER  [TACTILE_SWITCH-SMD-RIGHT-ANGLE]  43.69,26.92 270 top
S3  POWER  [TACTILE_SWITCH-SMD-RIGHT-ANGLE]  76.71,26.92 270 top
S4  POWER  [TACTILE_SWITCH-SMD-RIGHT-ANGLE]  109.73,26.92 270 top
S5  POWER  [TACTILE_SWITCH-SMD-RIGHT-ANGLE]  10.67,75.18 270 top
S6  POWER  [TACTILE_SWITCH-SMD-RIGHT-ANGLE]  43.69,75.18 270 top
S7  POWER  [TACTILE_SWITCH-SMD-RIGHT-ANGLE]  76.71,75.18 270 top
S8  POWER  [TACTILE_SWITCH-SMD-RIGHT-ANGLE]  109.73,75.18 270 top
SJ1  JUMPER-PAD-2-NC_BY_TRACE  [PAD-JUMPER-2-NC_BY_TRACE_YES_SILK]  13.34,33.15 90 top
SJ2  JUMPER-PAD-2-NC_BY_TRACE  [PAD-JUMPER-2-NC_BY_TRACE_YES_SILK]  13.34,38.1 90 top
SJ3  JUMPER-PAD-2-NC_BY_TRACE  [PAD-JUMPER-2-NC_BY_TRACE_YES_SILK]  13.34,45.34 90 top
SJ4  JUMPER-PAD-2-NC_BY_TRACE  [PAD-JUMPER-2-NC_BY_TRACE_YES_SILK]  46.35,33.15 90 top
SJ5  JUMPER-PAD-2-NC_BY_TRACE  [PAD-JUMPER-2-NC_BY_TRACE_YES_SILK]  46.35,38.1 90 top
SJ6  JUMPER-PAD-2-NC_BY_TRACE  [PAD-JUMPER-2-NC_BY_TRACE_YES_SILK]  46.35,45.34 90 top
SJ7  JUMPER-PAD-2-NC_BY_TRACE  [PAD-JUMPER-2-NC_BY_TRACE_YES_SILK]  79.38,33.15 90 top
SJ8  JUMPER-PAD-2-NC_BY_TRACE  [PAD-JUMPER-2-NC_BY_TRACE_YES_SILK]  79.38,38.1 90 top
SJ9  JUMPER-PAD-2-NC_BY_TRACE  [PAD-JUMPER-2-NC_BY_TRACE_YES_SILK]  79.38,45.34 90 top
SJ10  JUMPER-PAD-2-NC_BY_TRACE  [PAD-JUMPER-2-NC_BY_TRACE_YES_SILK]  112.39,33.15 90 top
SJ11  JUMPER-PAD-2-NC_BY_TRACE  [PAD-JUMPER-2-NC_BY_TRACE_YES_SILK]  112.39,38.1 90 top
SJ12  JUMPER-PAD-2-NC_BY_TRACE  [PAD-JUMPER-2-NC_BY_TRACE_YES_SILK]  112.39,45.34 90 top
SJ13  JUMPER-PAD-2-NC_BY_TRACE  [PAD-JUMPER-2-NC_BY_TRACE_YES_SILK]  13.34,81.41 90 top
SJ14  JUMPER-PAD-2-NC_BY_TRACE  [PAD-JUMPER-2-NC_BY_TRACE_YES_SILK]  13.34,86.36 90 top
SJ15  JUMPER-PAD-2-NC_BY_TRACE  [PAD-JUMPER-2-NC_BY_TRACE_YES_SILK]  13.34,93.6 90 top
SJ16  JUMPER-PAD-2-NC_BY_TRACE  [PAD-JUMPER-2-NC_BY_TRACE_YES_SILK]  46.35,81.41 90 top
SJ17  JUMPER-PAD-2-NC_BY_TRACE  [PAD-JUMPER-2-NC_BY_TRACE_YES_SILK]  46.35,86.36 90 top
SJ18  JUMPER-PAD-2-NC_BY_TRACE  [PAD-JUMPER-2-NC_BY_TRACE_YES_SILK]  46.35,93.6 90 top
SJ19  JUMPER-PAD-2-NC_BY_TRACE  [PAD-JUMPER-2-NC_BY_TRACE_YES_SILK]  79.38,81.41 90 top
SJ20  JUMPER-PAD-2-NC_BY_TRACE  [PAD-JUMPER-2-NC_BY_TRACE_YES_SILK]  79.38,86.36 90 top
SJ21  JUMPER-PAD-2-NC_BY_TRACE  [PAD-JUMPER-2-NC_BY_TRACE_YES_SILK]  79.38,93.6 90 top
SJ22  JUMPER-PAD-2-NC_BY_TRACE  [PAD-JUMPER-2-NC_BY_TRACE_YES_SILK]  112.39,81.41 90 top
SJ23  JUMPER-PAD-2-NC_BY_TRACE  [PAD-JUMPER-2-NC_BY_TRACE_YES_SILK]  112.39,86.36 90 top
SJ24  JUMPER-PAD-2-NC_BY_TRACE  [PAD-JUMPER-2-NC_BY_TRACE_YES_SILK]  112.39,93.6 90 top
U1  FT231XS-U  [SSOP20_L]  57.15,37.08 90 top
U2  FT231XS-U  [SSOP20_L]  24.13,37.08 90 top
U3  TPS62065  [WSON-8-PAD]  54.61,21.84 180 top
U4  TPS62065  [WSON-8-PAD]  21.59,21.84 180 top
U5  FT231XS-U  [SSOP20_L]  90.17,37.08 90 top
U6  TPS62065  [WSON-8-PAD]  87.63,21.84 180 top
U7  FT231XS-U  [SSOP20_L]  123.19,37.08 90 top
U8  TPS62065  [WSON-8-PAD]  120.65,21.84 180 top
U9  FT231XS-U  [SSOP20_L]  24.13,85.34 90 top
U10  TPS62065  [WSON-8-PAD]  21.59,70.1 180 top
U11  FT231XS-U  [SSOP20_L]  57.15,85.34 90 top
U12  TPS62065  [WSON-8-PAD]  54.61,70.1 180 top
U13  FT231XS-U  [SSOP20_L]  90.17,85.34 90 top
U14  TPS62065  [WSON-8-PAD]  87.63,70.1 180 top
U15  FT231XS-U  [SSOP20_L]  123.19,85.34 90 top
U16  TPS62065  [WSON-8-PAD]  120.65,70.1 180 top
U$1  EDISON_CONNECTOR_FULLHEADER  [DF40C-70DP-0.4(51)]  66.55,23.04 90 bottom
U$2  EDISON_CONNECTOR_FULLHEADER  [DF40C-70DP-0.4(51)]  99.57,23.04 90 bottom
U$3  EDISON_CONNECTOR_FULLHEADER  [DF40C-70DP-0.4(51)]  33.53,23.04 90 bottom
U$4  EDISON_CONNECTOR_FULLHEADER  [DF40C-70DP-0.4(51)]  132.59,23.04 90 bottom
U$5  EDISON_CONNECTOR_FULLHEADER  [DF40C-70DP-0.4(51)]  33.53,71.3 90 bottom
U$6  EDISON_CONNECTOR_FULLHEADER  [DF40C-70DP-0.4(51)]  66.55,71.3 90 bottom
U$7  EDISON_CONNECTOR_FULLHEADER  [DF40C-70DP-0.4(51)]  99.57,71.3 90 bottom
U$8  EDISON_CONNECTOR_FULLHEADER  [DF40C-70DP-0.4(51)]  132.59,71.3 90 bottom

## Library data of the parts
C1 C2 C5 C6 C15 C16 C22 C23 C29 C30 C36 C37 C43 C44 C50 C51 = SparkFun-Capacitors; PROD_ID: CAP-08604
C3 C4 C7 C9 C11 C13 C17 C18 C20 C24 C25 C27 C31 C32 C34 C38 C39 C41 C45 C46 C48 C52 C53 C55 = SparkFun-Capacitors; PROD_ID: CAP-08913
C8 C12 C19 C26 C33 C40 C47 C54 = SparkFun-Capacitors; PROD_ID: CAP-08402
C10 C14 C21 C28 C35 C42 C49 C56 = SparkFun-Capacitors; PROD_ID: CAP-08280
D1 D4 D7 D10 D13 D16 D19 D22 = SparkFun-LED; PROD_ID: DIO-00819
D2 D5 D8 D11 D14 D17 D20 D23 = SparkFun-LED; PROD_ID: DIO-09003
D3 D6 D9 D12 D15 D18 D21 D24 = SparkFun-LED; PROD_ID: DIO-08575
E1-E8 U$1-U$8 = Edison
E$1 E$2 = SparkFun-Retired
E$3-E$6 FID1-FID32 LOGO1-LOGO32 = SparkFun-Aesthetics
JP1-JP8 = SparkFun-Connectors; PROD_ID: CONN-11752
L1-L8 SJ1-SJ24 = SparkFun-Passives
Q1-Q8 = SparkFun-DiscreteSemi; PROD_ID: TRANS-00830
R1 R2 R11 R12 R25 R26 R37 R38 R49 R50 R61 R62 R73 R74 R85 R86 = SparkFun-Resistors; PROD_ID: RES-09334
R3-R5 R10 R15-R17 R24 R27-R29 R36 R39-R41 R48 R51-R53 R60 R63-R65 R72 R75-R77 R84 R87-R89 R96 = SparkFun-Resistors; PROD_ID: RES-07856
R6 R7 R18 R19 R30 R31 R42 R43 R54 R55 R66 R67 R78 R79 R90 R91 = SparkFun-Resistors; PROD_ID: RES-07863
R8 R20 R32 R44 R56 R68 R80 R92 = SparkFun-Resistors; PROD_ID: RES-00824
R9 R21 R33 R45 R57 R69 R81 R93 = SparkFun-Resistors; PROD_ID: RES-08698
R13 R14 R22 R23 R34 R35 R46 R47 R58 R59 R70 R71 R82 R83 R94 R95 = SparkFun-Resistors
S1-S8 = SparkFun-Electromechanical; PROD_ID: COMP-12265
U1 U2 U5 U7 U9 U11 U13 U15 = SparkFun-DigitalIC; PROD_ID: IC-11524
U3 U4 U6 U8 U10 U12 U14 U16 = Testing

## Nets
1.8V: C1.2 E1.12 U2.3 U2.14 U$3.12
1.8V1: C5.2 E2.12 U1.3 U1.14 U$1.12
1.8V2: C15.2 E3.12 U5.3 U5.14 U$2.12
1.8V3: C22.2 E4.12 U7.3 U7.14 U$4.12
1.8V4: C29.2 E5.12 U9.3 U9.14 U$5.12
1.8V5: C36.2 E6.12 U11.3 U11.14 U$6.12
1.8V6: C43.2 E7.12 U13.3 U13.14 U$7.12
1.8V7: C50.2 E8.12 U15.3 U15.14 U$8.12
3.3V: E1.8 E1.10 U$3.8 U$3.10
3.3V1: E2.8 E2.10 U$1.8 U$1.10
3.3V2: E3.8 E3.10 U$2.8 U$2.10
3.3V3: E4.8 E4.10 U$4.8 U$4.10
3.3V4: E5.8 E5.10 U$5.8 U$5.10
3.3V5: E6.8 E6.10 U$6.8 U$6.10
3.3V6: E7.8 E7.10 U$7.8 U$7.10
3.3V7: E8.8 E8.10 U$8.8 U$8.10
5V: C2.2 C10.1 JP1.VBUS1 R10.2 U2.15 U4.5 U4.7 U4.8
5V1: C6.2 C14.1 JP2.VBUS1 R24.2 U1.15 U3.5 U3.7 U3.8
5V2: C16.2 C21.1 JP3.VBUS1 R36.2 U5.15 U6.5 U6.7 U6.8
5V3: C23.2 C28.1 JP4.VBUS1 R48.2 U7.15 U8.5 U8.7 U8.8
5V4: C30.2 C35.1 JP5.VBUS1 R60.2 U9.15 U10.5 U10.7 U10.8
5V5: C37.2 C42.1 JP6.VBUS1 R72.2 U11.15 U12.5 U12.7 U12.8
5V6: C44.2 C49.1 JP7.VBUS1 R84.2 U13.15 U14.5 U14.7 U14.8
5V7: C51.2 C56.1 JP8.VBUS1 R96.2 U15.15 U16.5 U16.7 U16.8
DCIN: E1.14 Q1.2 U$3.14
DCIN1: E2.14 Q2.2 U$1.14
DCIN2: E3.14 Q3.2 U$2.14
DCIN3: E4.14 Q4.2 U$4.14
DCIN4: E5.14 Q5.2 U$5.14
DCIN5: E6.14 Q6.2 U$6.14
DCIN6: E7.14 Q7.2 U$7.14
DCIN7: E8.14 Q8.2 U$8.14
FAULT: E1.19 U$3.19
FAULT1: E2.19 U$1.19
FAULT2: E3.19 U$2.19
FAULT3: E4.19 U$4.19
FAULT4: E5.19 U$5.19
FAULT5: E6.19 U$6.19
FAULT6: E7.19 U$7.19
FAULT7: E8.19 U$8.19
FW_RCVR: E1.69 U$3.69
FW_RCVR1: E2.69 U$1.69
FW_RCVR2: E3.69 U$2.69
FW_RCVR3: E4.69 U$4.69
FW_RCVR4: E5.69 U$5.69
FW_RCVR5: E6.69 U$6.69
FW_RCVR6: E7.69 U$7.69
FW_RCVR7: E8.69 U$8.69
GND: C1.1 C2.1 C3.2 C4.2 C8.2 C10.2 E1.1 E1.5 E1.9 E1.11 E1.13 E1.15 JP1.GND1 JP1.SHIELD1 JP1.SHIELD2 JP1.SHIELD3 R14.1 S1.2 SJ3.1 U2.6 U2.16 U4.1 U4.3 U4.6 U4.PAD U$3.1 U$3.5 U$3.9 U$3.11 U$3.13 U$3.15
GND1: C5.1 C6.1 C7.2 C11.2 C12.2 C14.2 E2.1 E2.5 E2.9 E2.11 E2.13 E2.15 JP2.GND1 JP2.SHIELD1 JP2.SHIELD2 JP2.SHIELD3 R23.1 S2.2 SJ6.1 U1.6 U1.16 U3.1 U3.3 U3.6 U3.PAD U$1.1 U$1.5 U$1.9 U$1.11 U$1.13 U$1.15
GND2: C15.1 C16.1 C17.2 C18.2 C19.2 C21.2 E3.1 E3.5 E3.9 E3.11 E3.13 E3.15 JP3.GND1 JP3.SHIELD1 JP3.SHIELD2 JP3.SHIELD3 R35.1 S3.2 SJ9.1 U5.6 U5.16 U6.1 U6.3 U6.6 U6.PAD U$2.1 U$2.5 U$2.9 U$2.11 U$2.13 U$2.15
GND3: C22.1 C23.1 C24.2 C25.2 C26.2 C28.2 E4.1 E4.5 E4.9 E4.11 E4.13 E4.15 JP4.GND1 JP4.SHIELD1 JP4.SHIELD2 JP4.SHIELD3 R47.1 S4.2 SJ12.1 U7.6 U7.16 U8.1 U8.3 U8.6 U8.PAD U$4.1 U$4.5 U$4.9 U$4.11 U$4.13 U$4.15
GND4: C29.1 C30.1 C31.2 C32.2 C33.2 C35.2 E5.1 E5.5 E5.9 E5.11 E5.13 E5.15 JP5.GND1 JP5.SHIELD1 JP5.SHIELD2 JP5.SHIELD3 R59.1 S5.2 SJ15.1 U9.6 U9.16 U10.1 U10.3 U10.6 U10.PAD U$5.1 U$5.5 U$5.9 U$5.11 U$5.13 U$5.15
GND5: C36.1 C37.1 C38.2 C39.2 C40.2 C42.2 E6.1 E6.5 E6.9 E6.11 E6.13 E6.15 JP6.GND1 JP6.SHIELD1 JP6.SHIELD2 JP6.SHIELD3 R71.1 S6.2 SJ18.1 U11.6 U11.16 U12.1 U12.3 U12.6 U12.PAD U$6.1 U$6.5 U$6.9 U$6.11 U$6.13 U$6.15
GND6: C43.1 C44.1 C45.2 C46.2 C47.2 C49.2 E7.1 E7.5 E7.9 E7.11 E7.13 E7.15 JP7.GND1 JP7.SHIELD1 JP7.SHIELD2 JP7.SHIELD3 R83.1 S7.2 SJ21.1 U13.6 U13.16 U14.1 U14.3 U14.6 U14.PAD U$7.1 U$7.5 U$7.9 U$7.11 U$7.13 U$7.15
GND7: C50.1 C51.1 C52.2 C53.2 C54.2 C56.2 E8.1 E8.5 E8.9 E8.11 E8.13 E8.15 JP8.GND1 JP8.SHIELD1 JP8.SHIELD2 JP8.SHIELD3 R95.1 S8.2 SJ24.1 U15.6 U15.16 U16.1 U16.3 U16.6 U16.PAD U$8.1 U$8.5 U$8.9 U$8.11 U$8.13 U$8.15
GP1: E2.48 U$1.48
GP2: E2.42 U$1.42
GP3: E2.34 U$1.34
GP4: E2.32 U$1.32
GP5: E2.30 U$1.30
GP6: E2.28 U$1.28
GP7: E2.26 U$1.26
GP8: E2.25 U$1.25
GP9: E2.24 U$1.24
GP10: E3.48 U$2.48
GP11: E3.42 U$2.42
GP12: E3.34 U$2.34
GP12_PWM0: E1.35 U$3.35
GP12_PWM1: E2.35 U$1.35
GP12_PWM2: E3.35 U$2.35
GP12_PWM3: E4.35 U$4.35
GP12_PWM4: E5.35 U$5.35
GP12_PWM5: E6.35 U$6.35
GP12_PWM6: E7.35 U$7.35
GP12_PWM7: E8.35 U$8.35
GP13: E3.32 U$2.32
GP13_PWM1: E1.33 U$3.33
GP13_PWM2: E2.33 U$1.33
GP13_PWM3: E3.33 U$2.33
GP13_PWM4: E4.33 U$4.33
GP13_PWM5: E5.33 U$5.33
GP13_PWM6: E6.33 U$6.33
GP13_PWM7: E7.33 U$7.33
GP13_PWM8: E8.33 U$8.33
GP14: E1.48 U$3.48
GP15: E1.42 U$3.42
GP16: E3.30 U$2.30
GP17: E3.28 U$2.28
GP18: E3.26 U$2.26
GP19: E3.25 U$2.25
GP19_I2C_1_SCL: E1.41 U$3.41
GP19_I2C_1_SCL1: E2.41 U$1.41
GP19_I2C_1_SCL2: E3.41 U$2.41
GP19_I2C_1_SCL3: E4.41 U$4.41
GP19_I2C_1_SCL4: E5.41 U$5.41
GP19_I2C_1_SCL5: E6.41 U$6.41
GP19_I2C_1_SCL6: E7.41 U$7.41
GP19_I2C_1_SCL7: E8.41 U$8.41
GP20: E3.24 U$2.24
GP20_I2C_1_SDA: E1.43 U$3.43
GP20_I2C_1_SDA1: E2.43 U$1.43
GP20_I2C_1_SDA2: E3.43 U$2.43
GP20_I2C_1_SDA3: E4.43 U$4.43
GP20_I2C_1_SDA4: E5.43 U$5.43
GP20_I2C_1_SDA5: E6.43 U$6.43
GP20_I2C_1_SDA6: E7.43 U$7.43
GP20_I2C_1_SDA7: E8.43 U$8.43
GP21: E4.48 U$4.48
GP22: E4.42 U$4.42
GP23: E4.34 U$4.34
GP24: E4.32 U$4.32
GP25: E4.30 U$4.30
GP26: E4.28 U$4.28
GP27: E4.26 U$4.26
GP27_I2C_6_SCL: E1.45 U$3.45
GP27_I2C_6_SCL1: E2.45 U$1.45
GP27_I2C_6_SCL2: E3.45 U$2.45
GP27_I2C_6_SCL3: E4.45 U$4.45
GP27_I2C_6_SCL4: E5.45 U$5.45
GP27_I2C_6_SCL5: E6.45 U$6.45
GP27_I2C_6_SCL6: E7.45 U$7.45
GP27_I2C_6_SCL7: E8.45 U$8.45
GP28: E4.25 U$4.25
GP28_I2C_6_SDA: E1.47 U$3.47
GP28_I2C_6_SDA1: E2.47 U$1.47
GP28_I2C_6_SDA2: E3.47 U$2.47
GP28_I2C_6_SDA3: E4.47 U$4.47
GP28_I2C_6_SDA4: E5.47 U$5.47
GP28_I2C_6_SDA5: E6.47 U$6.47
GP28_I2C_6_SDA6: E7.47 U$7.47
GP28_I2C_6_SDA7: E8.47 U$8.47
GP29: E4.24 U$4.24
GP30: E5.48 U$5.48
GP31: E5.42 U$5.42
GP32: E5.34 U$5.34
GP33: E5.32 U$5.32
GP34: E5.30 U$5.30
GP35: E5.28 U$5.28
GP36: E5.26 U$5.26
GP37: E5.25 U$5.25
GP38: E5.24 U$5.24
GP39: E6.48 U$6.48
GP40: E6.42 U$6.42
GP40_I2S_2_CLK: E1.52 U$3.52
GP40_I2S_2_CLK1: E2.52 U$1.52
GP40_I2S_2_CLK2: E3.52 U$2.52
GP40_I2S_2_CLK3: E4.52 U$4.52
GP40_I2S_2_CLK4: E5.52 U$5.52
GP40_I2S_2_CLK5: E6.52 U$6.52
GP40_I2S_2_CLK6: E7.52 U$7.52
GP40_I2S_2_CLK7: E8.52 U$8.52
GP41: E6.34 U$6.34
GP41_I2S_2_FS: E1.54 U$3.54
GP41_I2S_2_FS1: E2.54 U$1.54
GP41_I2S_2_FS2: E3.54 U$2.54
GP41_I2S_2_FS3: E4.54 U$4.54
GP41_I2S_2_FS4: E5.54 U$5.54
GP41_I2S_2_FS5: E6.54 U$6.54
GP41_I2S_2_FS6: E7.54 U$7.54
GP41_I2S_2_FS7: E8.54 U$8.54
GP42: E6.32 U$6.32
GP42_I2S_2_RXD: E1.50 U$3.50
GP42_I2S_2_RXD1: E2.50 U$1.50
GP42_I2S_2_RXD2: E3.50 U$2.50
GP42_I2S_2_RXD3: E4.50 U$4.50
GP42_I2S_2_RXD4: E5.50 U$5.50
GP42_I2S_2_RXD5: E6.50 U$6.50
GP42_I2S_2_RXD6: E7.50 U$7.50
GP42_I2S_2_RXD7: E8.50 U$8.50
GP43: E6.30 U$6.30
GP43_I2S_2_TXD: E1.56 U$3.56
GP43_I2S_2_TXD1: E2.56 U$1.56
GP43_I2S_2_TXD2: E3.56 U$2.56
GP43_I2S_2_TXD3: E4.56 U$4.56
GP43_I2S_2_TXD4: E5.56 U$5.56
GP43_I2S_2_TXD5: E6.56 U$6.56
GP43_I2S_2_TXD6: E7.56 U$7.56
GP43_I2S_2_TXD7: E8.56 U$8.56
GP44: E1.24 U$3.24
GP45: E1.26 U$3.26
GP46: E1.28 U$3.28
GP47: E1.30 U$3.30
GP48: E1.32 U$3.32
GP49: E1.34 U$3.34
GP50: E6.28 U$6.28
GP51: E6.26 U$6.26
GP52: E6.25 U$6.25
GP53: E6.24 U$6.24
GP54: E7.48 U$7.48
GP55: E7.42 U$7.42
GP56: E7.34 U$7.34
GP57: E7.32 U$7.32
GP58: E7.30 U$7.30
GP59: E7.28 U$7.28
GP60: E7.26 U$7.26
GP61: E7.25 U$7.25
GP62: E7.24 U$7.24
GP63: E8.48 U$8.48
GP64: E8.42 U$8.42
GP65: E8.34 U$8.34
GP66: E8.32 U$8.32
GP67: E8.30 U$8.30
GP68: E8.28 U$8.28
GP69: E8.26 U$8.26
GP70: E8.25 U$8.25
GP71: E8.24 U$8.24
GP77_SD_0_CD#: E1.60 U$3.60
GP77_SD_0_CD#1: E2.60 U$1.60
GP77_SD_0_CD#2: E3.60 U$2.60
GP77_SD_0_CD#3: E4.60 U$4.60
GP77_SD_0_CD#4: E5.60 U$5.60
GP77_SD_0_CD#5: E6.60 U$6.60
GP77_SD_0_CD#6: E7.60 U$7.60
GP77_SD_0_CD#7: E8.60 U$8.60
GP78_SD_0_CLK: E1.58 U$3.58
GP78_SD_0_CLK1: E2.58 U$1.58
GP78_SD_0_CLK2: E3.58 U$2.58
GP78_SD_0_CLK3: E4.58 U$4.58
GP78_SD_0_CLK4: E5.58 U$5.58
GP78_SD_0_CLK5: E6.58 U$6.58
GP78_SD_0_CLK6: E7.58 U$7.58
GP78_SD_0_CLK7: E8.58 U$8.58
GP79_SD_0_CMD: E1.62 U$3.62
GP79_SD_0_CMD1: E2.62 U$1.62
GP79_SD_0_CMD2: E3.62 U$2.62
GP79_SD_0_CMD3: E4.62 U$4.62
GP79_SD_0_CMD4: E5.62 U$5.62
GP79_SD_0_CMD5: E6.62 U$6.62
GP79_SD_0_CMD6: E7.62 U$7.62
GP79_SD_0_CMD7: E8.62 U$8.62
GP80_SD_0_DAT0: E1.66 U$3.66
GP80_SD_0_DAT1: E2.66 U$1.66
GP80_SD_0_DAT2: E3.66 U$2.66
GP80_SD_0_DAT3: E4.66 U$4.66
GP80_SD_0_DAT4: E5.66 U$5.66
GP80_SD_0_DAT5: E6.66 U$6.66
GP80_SD_0_DAT6: E7.66 U$7.66
GP80_SD_0_DAT7: E8.66 U$8.66
GP81_SD_0_DAT1: E1.70 U$3.70
GP81_SD_0_DAT2: E2.70 U$1.70
GP81_SD_0_DAT3: E3.70 U$2.70
GP81_SD_0_DAT4: E4.70 U$4.70
GP81_SD_0_DAT5: E5.70 U$5.70
GP81_SD_0_DAT6: E6.70 U$6.70
GP81_SD_0_DAT7: E7.70 U$7.70
GP81_SD_0_DAT8: E8.70 U$8.70
GP82_SD_0_DAT1: E2.64 U$1.64
GP82_SD_0_DAT2: E1.64 U$3.64
GP82_SD_0_DAT3: E3.64 U$2.64
GP82_SD_0_DAT4: E4.64 U$4.64
GP82_SD_0_DAT5: E5.64 U$5.64
GP82_SD_0_DAT6: E6.64 U$6.64
GP82_SD_0_DAT7: E7.64 U$7.64
GP82_SD_0_DAT8: E8.64 U$8.64
GP83_SD_0_DAT1: E2.68 U$1.68
GP83_SD_0_DAT2: E3.68 U$2.68
GP83_SD_0_DAT3: E1.68 U$3.68
GP83_SD_0_DAT4: E4.68 U$4.68
GP83_SD_0_DAT5: E5.68 U$5.68
GP83_SD_0_DAT6: E6.68 U$6.68
GP83_SD_0_DAT7: E7.68 U$7.68
GP83_SD_0_DAT8: E8.68 U$8.68
GP84_SD_CLK_FB: E1.44 U$3.44
GP84_SD_CLK_FB1: E2.44 U$1.44
GP84_SD_CLK_FB2: E3.44 U$2.44
GP84_SD_CLK_FB3: E4.44 U$4.44
GP84_SD_CLK_FB4: E5.44 U$5.44
GP84_SD_CLK_FB5: E6.44 U$6.44
GP84_SD_CLK_FB6: E7.44 U$7.44
GP84_SD_CLK_FB7: E8.44 U$8.44
GP109_SPI_2_CLK: E1.55 U$3.55
GP109_SPI_2_CLK1: E2.55 U$1.55
GP109_SPI_2_CLK2: E3.55 U$2.55
GP109_SPI_2_CLK3: E4.55 U$4.55
GP109_SPI_2_CLK4: E5.55 U$5.55
GP109_SPI_2_CLK5: E6.55 U$6.55
GP109_SPI_2_CLK6: E7.55 U$7.55
GP109_SPI_2_CLK7: E8.55 U$8.55
GP110_SPI_2_FS0: E1.53 U$3.53
GP110_SPI_2_FS1: E2.53 U$1.53
GP110_SPI_2_FS2: E3.53 U$2.53
GP110_SPI_2_FS3: E4.53 U$4.53
GP110_SPI_2_FS4: E5.53 U$5.53
GP110_SPI_2_FS5: E6.53 U$6.53
GP110_SPI_2_FS6: E7.53 U$7.53
GP110_SPI_2_FS7: E8.53 U$8.53
GP111_SPI_2_FS1: E1.51 U$3.51
GP111_SPI_2_FS2: E2.51 U$1.51
GP111_SPI_2_FS3: E3.51 U$2.51
GP111_SPI_2_FS4: E4.51 U$4.51
GP111_SPI_2_FS5: E5.51 U$5.51
GP111_SPI_2_FS6: E6.51 U$6.51
GP111_SPI_2_FS7: E7.51 U$7.51
GP111_SPI_2_FS8: E8.51 U$8.51
GP114_SPI_2_RXD: E1.59 U$3.59
GP114_SPI_2_RXD1: E2.59 U$1.59
GP114_SPI_2_RXD2: E3.59 U$2.59
GP114_SPI_2_RXD3: E4.59 U$4.59
GP114_SPI_2_RXD4: E5.59 U$5.59
GP114_SPI_2_RXD5: E6.59 U$6.59
GP114_SPI_2_RXD6: E7.59 U$7.59
GP114_SPI_2_RXD7: E8.59 U$8.59
GP115_SPI_2_TXD: E1.57 U$3.57
GP115_SPI_2_TXD1: E2.57 U$1.57
GP115_SPI_2_TXD2: E3.57 U$2.57
GP115_SPI_2_TXD3: E4.57 U$4.57
GP115_SPI_2_TXD4: E5.57 U$5.57
GP115_SPI_2_TXD5: E6.57 U$6.57
GP115_SPI_2_TXD6: E7.57 U$7.57
GP115_SPI_2_TXD7: E8.57 U$8.57
GP128_UART_1_CTS: E1.65 U$3.65
GP128_UART_1_CTS1: E2.65 U$1.65
GP128_UART_1_CTS2: E3.65 U$2.65
GP128_UART_1_CTS3: E4.65 U$4.65
GP128_UART_1_CTS4: E5.65 U$5.65
GP128_UART_1_CTS5: E6.65 U$6.65
GP128_UART_1_CTS6: E7.65 U$7.65
GP128_UART_1_CTS7: E8.65 U$8.65
GP129_UART_1_RTS: E1.63 U$3.63
GP129_UART_1_RTS1: E2.63 U$1.63
GP129_UART_1_RTS2: E3.63 U$2.63
GP129_UART_1_RTS3: E4.63 U$4.63
GP129_UART_1_RTS4: E5.63 U$5.63
GP129_UART_1_RTS5: E6.63 U$6.63
GP129_UART_1_RTS6: E7.63 U$7.63
GP129_UART_1_RTS7: E8.63 U$8.63
GP130_UART_1_RX: E1.61 U$3.61
GP130_UART_1_RX1: E2.61 U$1.61
GP130_UART_1_RX2: E3.61 U$2.61
GP130_UART_1_RX3: E4.61 U$4.61
GP130_UART_1_RX4: E5.61 U$5.61
GP130_UART_1_RX5: E6.61 U$6.61
GP130_UART_1_RX6: E7.61 U$7.61
GP130_UART_1_RX7: E8.61 U$8.61
GP131_UART_1_TX: E1.46 U$3.46
GP131_UART_1_TX1: E2.46 U$1.46
GP131_UART_1_TX2: E3.46 U$2.46
GP131_UART_1_TX3: E4.46 U$4.46
GP131_UART_1_TX4: E5.46 U$5.46
GP131_UART_1_TX5: E6.46 U$6.46
GP131_UART_1_TX6: E7.46 U$7.46
GP131_UART_1_TX7: E8.46 U$8.46
GP134_UART_2_RX: E1.22 R6.2 U$3.22
GP134_UART_2_RX1: E2.22 R18.2 U$1.22
GP134_UART_2_RX2: E3.22 R30.2 U$2.22
GP134_UART_2_RX3: E4.22 R42.2 U$4.22
GP134_UART_2_RX4: E5.22 R54.2 U$5.22
GP134_UART_2_RX5: E6.22 R66.2 U$6.22
GP134_UART_2_RX6: E7.22 R78.2 U$7.22
GP134_UART_2_RX7: E8.22 R90.2 U$8.22
GP135_UART_2_TX: E1.27 R7.2 U$3.27
GP135_UART_2_TX1: E2.27 R19.2 U$1.27
GP135_UART_2_TX2: E3.27 R31.2 U$2.27
GP135_UART_2_TX3: E4.27 R43.2 U$4.27
GP135_UART_2_TX4: E5.27 R55.2 U$5.27
GP135_UART_2_TX5: E6.27 R67.2 U$6.27
GP135_UART_2_TX6: E7.27 R79.2 U$7.27
GP135_UART_2_TX7: E8.27 R91.2 U$8.27
GP165: E1.25 U$3.25
GP182_PWM1: E2.37 U$1.37
GP182_PWM2: E1.37 U$3.37
GP182_PWM3: E3.37 U$2.37
GP182_PWM4: E4.37 U$4.37
GP182_PWM5: E5.37 U$5.37
GP182_PWM6: E6.37 U$6.37
GP182_PWM7: E7.37 U$7.37
GP182_PWM8: E8.37 U$8.37
GP183_PWM1: E2.39 U$1.39
GP183_PWM2: E3.39 U$2.39
GP183_PWM3: E1.39 U$3.39
GP183_PWM4: E4.39 U$4.39
GP183_PWM5: E5.39 U$5.39
GP183_PWM6: E6.39 U$6.39
GP183_PWM7: E7.39 U$7.39
GP183_PWM8: E8.39 U$8.39
MSIC_SLP_CLK: E1.7 U$3.7
MSIC_SLP_CLK1: E2.7 U$1.7
MSIC_SLP_CLK2: E3.7 U$2.7
MSIC_SLP_CLK3: E4.7 U$4.7
MSIC_SLP_CLK4: E5.7 U$5.7
MSIC_SLP_CLK5: E6.7 U$6.7
MSIC_SLP_CLK6: E7.7 U$7.7
MSIC_SLP_CLK7: E8.7 U$8.7
N$1: SJ1.1 U2.17
N$2: C3.1 JP1.D-1 R1.1
N$3: C4.1 JP1.D+1 R2.1
N$4: R1.2 U2.12
N$5: R2.2 U2.11
N$6: SJ2.1 U2.10
N$7: R3.1 SJ1.2
N$8: R4.1 SJ2.2
N$9: D1.C R3.2
N$10: D2.C R4.2
N$11: R6.1 U2.20
N$12: D3.C R5.2
N$13: R5.1 SJ3.2
N$14: R7.1 U2.4
N$15: R8.2 R9.2 S1.1
N$16: Q1.1 R10.1
N$17: C7.1 JP2.D-1 R11.1
N$18: C9.2 R13.1 R14.2 U4.4
N$19: L1.P$1 U4.2
N$20: C11.1 JP2.D+1 R12.1
N$21: R11.2 U1.12
N$22: R12.2 U1.11
N$23: SJ4.1 U1.17
N$24: SJ5.1 U1.10
N$25: R15.1 SJ4.2
N$26: R16.1 SJ5.2
N$27: D4.C R15.2
N$28: D5.C R16.2
N$29: D6.C R17.2
N$30: R17.1 SJ6.2
N$31: R18.1 U1.20
N$32: R19.1 U1.4
N$33: R20.2 R21.2 S2.1
N$34: C13.2 R22.1 R23.2 U3.4
N$35: L2.P$1 U3.2
N$36: Q2.1 R24.1
N$37: C17.1 JP3.D-1 R25.1
N$38: C18.1 JP3.D+1 R26.1
N$39: R25.2 U5.12
N$40: R26.2 U5.11
N$41: SJ7.1 U5.17
N$42: SJ8.1 U5.10
N$43: R27.1 SJ7.2
N$44: R28.1 SJ8.2
N$45: D7.C R27.2
N$46: D8.C R28.2
N$47: D9.C R29.2
N$48: R29.1 SJ9.2
N$49: R30.1 U5.20
N$50: R31.1 U5.4
N$51: R32.2 R33.2 S3.1
N$52: C20.2 R34.1 R35.2 U6.4
N$53: L3.P$1 U6.2
N$54: Q3.1 R36.1
N$55: C24.1 JP4.D-1 R37.1
N$56: C25.1 JP4.D+1 R38.1
N$57: R37.2 U7.12
N$58: R38.2 U7.11
N$59: SJ10.1 U7.17
N$60: SJ11.1 U7.10
N$61: R39.1 SJ10.2
N$62: R40.1 SJ11.2
N$63: D10.C R39.2
N$64: D11.C R40.2
N$65: D12.C R41.2
N$66: R41.1 SJ12.2
N$67: R42.1 U7.20
N$68: R43.1 U7.4
N$69: R44.2 R45.2 S4.1
N$70: C27.2 R46.1 R47.2 U8.4
N$71: L4.P$1 U8.2
N$72: Q4.1 R48.1
N$73: C31.1 JP5.D-1 R49.1
N$74: C32.1 JP5.D+1 R50.1
N$75: R49.2 U9.12
N$76: R50.2 U9.11
N$77: SJ13.1 U9.17
N$78: SJ14.1 U9.10
N$79: R51.1 SJ13.2
N$80: R52.1 SJ14.2
N$81: D13.C R51.2
N$82: D14.C R52.2
N$83: D15.C R53.2
N$84: R53.1 SJ15.2
N$85: R54.1 U9.20
N$86: R55.1 U9.4
N$87: R56.2 R57.2 S5.1
N$88: C34.2 R58.1 R59.2 U10.4
N$89: L5.P$1 U10.2
N$90: Q5.1 R60.1
N$91: C38.1 JP6.D-1 R61.1
N$92: C39.1 JP6.D+1 R62.1
N$93: R61.2 U11.12
N$94: R62.2 U11.11
N$95: SJ16.1 U11.17
N$96: SJ17.1 U11.10
N$97: R63.1 SJ16.2
N$98: R64.1 SJ17.2
N$99: D16.C R63.2
N$100: D17.C R64.2
N$101: D18.C R65.2
N$102: R65.1 SJ18.2
N$103: R66.1 U11.20
N$104: R67.1 U11.4
N$105: R68.2 R69.2 S6.1
N$106: C41.2 R70.1 R71.2 U12.4
N$107: L6.P$1 U12.2
N$108: Q6.1 R72.1
N$109: C45.1 JP7.D-1 R73.1
N$110: C46.1 JP7.D+1 R74.1
N$111: R73.2 U13.12
N$112: R74.2 U13.11
N$113: SJ19.1 U13.17
N$114: SJ20.1 U13.10
N$115: R75.1 SJ19.2
N$116: R76.1 SJ20.2
N$117: D19.C R75.2
N$118: D20.C R76.2
N$119: D21.C R77.2
N$120: R77.1 SJ21.2
N$121: R78.1 U13.20
N$122: R79.1 U13.4
N$123: R80.2 R81.2 S7.1
N$124: C48.2 R82.1 R83.2 U14.4
N$125: L7.P$1 U14.2
N$126: Q7.1 R84.1
N$127: C52.1 JP8.D-1 R85.1
N$128: C53.1 JP8.D+1 R86.1
N$129: R85.2 U15.12
N$130: R86.2 U15.11
N$131: SJ22.1 U15.17
N$132: SJ23.1 U15.10
N$133: R87.1 SJ22.2
N$134: R88.1 SJ23.2
N$135: D22.C R87.2
N$136: D23.C R88.2
N$137: D24.C R89.2
N$138: R89.1 SJ24.2
N$139: R90.1 U15.20
N$140: R91.1 U15.4
N$141: R92.2 R93.2 S8.1
N$142: C55.2 R94.1 R95.2 U16.4
N$143: L8.P$1 U16.2
N$144: Q8.1 R96.1
OSC_CLK_OUT: E1.67 U$3.67
OSC_CLK_OUT1: E2.67 U$1.67
OSC_CLK_OUT2: E3.67 U$2.67
OSC_CLK_OUT3: E4.67 U$4.67
OSC_CLK_OUT4: E5.67 U$5.67
OSC_CLK_OUT5: E6.67 U$6.67
OSC_CLK_OUT6: E7.67 U$7.67
OSC_CLK_OUT7: E8.67 U$8.67
PSW: E1.21 U$3.21
PSW1: E2.21 U$1.21
PSW2: E3.21 U$2.21
PSW3: E4.21 U$4.21
PSW4: E5.21 U$5.21
PSW5: E6.21 U$6.21
PSW6: E7.21 U$7.21
PSW7: E8.21 U$8.21
PWRBTN#: E1.17 R9.1 U$3.17
PWRBTN#1: E2.17 R21.1 U$1.17
PWRBTN#2: E3.17 R33.1 U$2.17
PWRBTN#3: E4.17 R45.1 U$4.17
PWRBTN#4: E5.17 R57.1 U$5.17
PWRBTN#5: E6.17 R69.1 U$6.17
PWRBTN#6: E7.17 R81.1 U$7.17
PWRBTN#7: E8.17 R93.1 U$8.17
RCVR_MODE: E1.31 U$3.31
RCVR_MODE1: E2.31 U$1.31
RCVR_MODE2: E3.31 U$2.31
RCVR_MODE3: E4.31 U$4.31
RCVR_MODE4: E5.31 U$5.31
RCVR_MODE5: E6.31 U$6.31
RCVR_MODE6: E7.31 U$7.31
RCVR_MODE7: E8.31 U$8.31
RESET_OUT#: E1.36 U$3.36
RESET_OUT#1: E2.36 U$1.36
RESET_OUT#2: E3.36 U$2.36
RESET_OUT#3: E4.36 U$4.36
RESET_OUT#4: E5.36 U$5.36
RESET_OUT#5: E6.36 U$6.36
RESET_OUT#6: E7.36 U$7.36
RESET_OUT#7: E8.36 U$8.36
USB_DN: E1.18 U$3.18
USB_DN1: E2.18 U$1.18
USB_DN2: E3.18 U$2.18
USB_DN3: E4.18 U$4.18
USB_DN4: E5.18 U$5.18
USB_DN5: E6.18 U$6.18
USB_DN6: E7.18 U$7.18
USB_DN7: E8.18 U$8.18
USB_DP: E1.16 U$3.16
USB_DP1: E2.16 U$1.16
USB_DP2: E3.16 U$2.16
USB_DP3: E4.16 U$4.16
USB_DP4: E5.16 U$5.16
USB_DP5: E6.16 U$6.16
USB_DP6: E7.16 U$7.16
USB_DP7: E8.16 U$8.16
USB_ID: E1.3 U$3.3
USB_ID1: E2.3 U$1.3
USB_ID2: E3.3 U$2.3
USB_ID3: E4.3 U$4.3
USB_ID4: E5.3 U$5.3
USB_ID5: E6.3 U$6.3
USB_ID6: E7.3 U$7.3
USB_ID7: E8.3 U$8.3
USB_VBUS: E1.20 U$3.20
USB_VBUS1: E2.20 U$1.20
USB_VBUS2: E3.20 U$2.20
USB_VBUS3: E4.20 U$4.20
USB_VBUS4: E5.20 U$5.20
USB_VBUS5: E6.20 U$6.20
USB_VBUS6: E7.20 U$7.20
USB_VBUS7: E8.20 U$8.20
V_BAT_BKUP: E1.23 U$3.23
V_BAT_BKUP1: E2.23 U$1.23
V_BAT_BKUP2: E3.23 U$2.23
V_BAT_BKUP3: E4.23 U$4.23
V_BAT_BKUP4: E5.23 U$5.23
V_BAT_BKUP5: E6.23 U$6.23
V_BAT_BKUP6: E7.23 U$7.23
V_BAT_BKUP7: E8.23 U$8.23
VSYS: C8.1 C9.1 D1.A D2.A D3.A E1.2 E1.4 E1.6 L1.P$2 Q1.3 R8.1 R13.2 U$3.2 U$3.4 U$3.6
VSYS1: C12.1 C13.1 D4.A D5.A D6.A E2.2 E2.4 E2.6 L2.P$2 Q2.3 R20.1 R22.2 U$1.2 U$1.4 U$1.6
VSYS2: C19.1 C20.1 D7.A D8.A D9.A E3.2 E3.4 E3.6 L3.P$2 Q3.3 R32.1 R34.2 U$2.2 U$2.4 U$2.6
VSYS3: C26.1 C27.1 D10.A D11.A D12.A E4.2 E4.4 E4.6 L4.P$2 Q4.3 R44.1 R46.2 U$4.2 U$4.4 U$4.6
VSYS4: C33.1 C34.1 D13.A D14.A D15.A E5.2 E5.4 E5.6 L5.P$2 Q5.3 R56.1 R58.2 U$5.2 U$5.4 U$5.6
VSYS5: C40.1 C41.1 D16.A D17.A D18.A E6.2 E6.4 E6.6 L6.P$2 Q6.3 R68.1 R70.2 U$6.2 U$6.4 U$6.6
VSYS6: C47.1 C48.1 D19.A D20.A D21.A E7.2 E7.4 E7.6 L7.P$2 Q7.3 R80.1 R82.2 U$7.2 U$7.4 U$7.6
VSYS7: C54.1 C55.1 D22.A D23.A D24.A E8.2 E8.4 E8.6 L8.P$2 Q8.3 R92.1 R94.2 U$8.2 U$8.4 U$8.6

## Tracks (layer width: path | path; a pad name or v marks a point on that pad's centre or on a via)
1.8V  (via drill 0.33, 0.51)
  Top 0.152: v29.34,29.84 29.34,29.29 30.79,27.84 U$3.12
  Top 0.254: C1.2 20.17,38.04 U2.14 22.92,38.04 v24.89,36.07 25.46,35.5 U2.3
  Bottom 0.152: v29.34,29.84 29.34,29.29 30.79,27.84 U$3.12
  Bottom 0.254: v29.34,29.84 29.34,31.62 v24.89,36.07
1.8V1  (via drill 0.33, 0.51)
  Top 0.152: v62.36,29.84 62.36,29.29 63.8,27.84 U$1.12
  Top 0.254: C5.2 53.19,38.04 U1.14 55.94,38.04 v57.91,36.07 58.48,35.5 U1.3
  Bottom 0.152: v62.36,29.84 62.36,29.29 63.8,27.84 U$1.12
  Bottom 0.254: v62.36,29.84 62.36,31.62 v57.91,36.07
1.8V2  (via drill 0.33, 0.51)
  Top 0.152: v95.38,29.84 95.38,29.29 96.83,27.84 U$2.12
  Top 0.254: C15.2 86.21,38.04 U5.14 88.96,38.04 v90.93,36.07 91.5,35.5 U5.3
  Bottom 0.152: v95.38,29.84 95.38,29.29 96.83,27.84 U$2.12
  Bottom 0.254: v95.38,29.84 95.38,31.62 v90.93,36.07
1.8V3  (via drill 0.33, 0.51)
  Top 0.152: v128.4,29.84 128.4,29.29 129.84,27.84 U$4.12
  Top 0.254: C22.2 119.23,38.04 U7.14 121.98,38.04 v123.95,36.07 124.52,35.5 U7.3
  Bottom 0.152: v128.4,29.84 128.4,29.29 129.84,27.84 U$4.12
  Bottom 0.254: v128.4,29.84 128.4,31.62 v123.95,36.07
1.8V4  (via drill 0.33, 0.51)
  Top 0.152: v29.34,78.11 29.34,77.55 30.79,76.1 U$5.12
  Top 0.254: C29.2 20.17,86.3 U9.14 22.92,86.3 v24.89,84.33 25.46,83.76 U9.3
  Bottom 0.152: v29.34,78.11 29.34,77.55 30.79,76.1 U$5.12
  Bottom 0.254: v29.34,78.11 29.34,79.88 v24.89,84.33
1.8V5  (via drill 0.33, 0.51)
  Top 0.152: v62.36,78.11 62.36,77.55 63.8,76.1 U$6.12
  Top 0.254: C36.2 53.19,86.3 U11.14 55.94,86.3 v57.91,84.33 58.48,83.76 U11.3
  Bottom 0.152: v62.36,78.11 62.36,77.55 63.8,76.1 U$6.12
  Bottom 0.254: v62.36,78.11 62.36,79.88 v57.91,84.33
1.8V6  (via drill 0.33, 0.51)
  Top 0.152: v95.38,78.11 95.38,77.55 96.83,76.1 U$7.12
  Top 0.254: C43.2 86.21,86.3 U13.14 88.96,86.3 v90.93,84.33 91.5,83.76 U13.3
  Bottom 0.152: v95.38,78.11 95.38,77.55 96.83,76.1 U$7.12
  Bottom 0.254: v95.38,78.11 95.38,79.88 v90.93,84.33
1.8V7  (via drill 0.33, 0.51)
  Top 0.152: v128.4,78.11 128.4,77.55 129.84,76.1 U$8.12
  Top 0.254: C50.2 119.23,86.3 U15.14 121.98,86.3 v123.95,84.33 124.52,83.76 U15.3
  Bottom 0.152: v128.4,78.11 128.4,77.55 129.84,76.1 U$8.12
  Bottom 0.254: v128.4,78.11 128.4,79.88 v123.95,84.33
3.3V  (via drill 0.33)
  Top 0.152: U$3.8
  Bottom 0.152: U$3.8
  other vias: 30.52,29.21
  pour Top (isolate 0.051): 30.99,28.18 32.74,28.18 32.74,28.7 31.23,28.7 30.89,29.04 30.89,29.38 30.7,29.57 30.37,29.57 30.16,29.36 30.16,29.01
  pour Bottom (isolate 0.051): 30.99,28.18 32.74,28.18 32.74,28.7 31.23,28.7 30.89,29.04 30.89,29.38 30.7,29.57 30.37,29.57 30.16,29.36 30.16,29.01
3.3V1  (via drill 0.33)
  Top 0.152: U$1.8
  Bottom 0.152: U$1.8
  other vias: 63.54,29.21
  pour Top (isolate 0.051): 64.01,28.18 65.76,28.18 65.76,28.7 64.25,28.7 63.91,29.04 63.91,29.38 63.72,29.57 63.39,29.57 63.18,29.36 63.18,29.01
  pour Bottom (isolate 0.051): 64.01,28.18 65.76,28.18 65.76,28.7 64.25,28.7 63.91,29.04 63.91,29.38 63.72,29.57 63.39,29.57 63.18,29.36 63.18,29.01
3.3V2  (via drill 0.33)
  Top 0.152: U$2.8
  Bottom 0.152: U$2.8
  other vias: 96.56,29.21
  pour Top (isolate 0.051): 97.03,28.18 98.78,28.18 98.78,28.7 97.27,28.7 96.93,29.04 96.93,29.38 96.74,29.57 96.41,29.57 96.2,29.36 96.2,29.01
  pour Bottom (isolate 0.051): 97.03,28.18 98.78,28.18 98.78,28.7 97.27,28.7 96.93,29.04 96.93,29.38 96.74,29.57 96.41,29.57 96.2,29.36 96.2,29.01
3.3V3  (via drill 0.33)
  Top 0.152: U$4.8
  Bottom 0.152: U$4.8
  other vias: 129.58,29.21
  pour Top (isolate 0.051): 130.05,28.18 131.8,28.18 131.8,28.7 130.29,28.7 129.95,29.04 129.95,29.38 129.76,29.57 129.43,29.57 129.22,29.36 129.22,29.01
  pour Bottom (isolate 0.051): 130.05,28.18 131.8,28.18 131.8,28.7 130.29,28.7 129.95,29.04 129.95,29.38 129.76,29.57 129.43,29.57 129.22,29.36 129.22,29.01
3.3V4  (via drill 0.33)
  Top 0.152: U$5.8
  Bottom 0.152: U$5.8
  other vias: 30.52,77.47
  pour Top (isolate 0.051): 30.99,76.44 32.74,76.44 32.74,76.96 31.23,76.96 30.89,77.3 30.89,77.64 30.7,77.83 30.37,77.83 30.16,77.62 30.16,77.27
  pour Bottom (isolate 0.051): 30.99,76.44 32.74,76.44 32.74,76.96 31.23,76.96 30.89,77.3 30.89,77.64 30.7,77.83 30.37,77.83 30.16,77.62 30.16,77.27
3.3V5  (via drill 0.33)
  Top 0.152: U$6.8
  Bottom 0.152: U$6.8
  other vias: 63.54,77.47
  pour Top (isolate 0.051): 64.01,76.44 65.76,76.44 65.76,76.96 64.25,76.96 63.91,77.3 63.91,77.64 63.72,77.83 63.39,77.83 63.18,77.62 63.18,77.27
  pour Bottom (isolate 0.051): 64.01,76.44 65.76,76.44 65.76,76.96 64.25,76.96 63.91,77.3 63.91,77.64 63.72,77.83 63.39,77.83 63.18,77.62 63.18,77.27
3.3V6  (via drill 0.33)
  Top 0.152: U$7.8
  Bottom 0.152: U$7.8
  other vias: 96.56,77.47
  pour Top (isolate 0.051): 97.03,76.44 98.78,76.44 98.78,76.96 97.27,76.96 96.93,77.3 96.93,77.64 96.74,77.83 96.41,77.83 96.2,77.62 96.2,77.27
  pour Bottom (isolate 0.051): 97.03,76.44 98.78,76.44 98.78,76.96 97.27,76.96 96.93,77.3 96.93,77.64 96.74,77.83 96.41,77.83 96.2,77.62 96.2,77.27
3.3V7  (via drill 0.33)
  Top 0.152: U$8.8
  Bottom 0.152: U$8.8
  other vias: 129.58,77.47
  pour Top (isolate 0.051): 130.05,76.44 131.8,76.44 131.8,76.96 130.29,76.96 129.95,77.3 129.95,77.64 129.76,77.83 129.43,77.83 129.22,77.62 129.22,77.27
  pour Bottom (isolate 0.051): 130.05,76.44 131.8,76.44 131.8,76.96 130.29,76.96 129.95,77.3 129.95,77.64 129.76,77.83 129.43,77.83 129.22,77.62 129.22,77.27
5V  (via drill 0.51)
  Top 0.254: U2.15 19.15,37.4 C2.2 | R10.2 v19.3,24.38
  Top 0.305: U2.15 22.29,37.4 v23.11,36.58 | v27.69,45.47 25.91,45.47 25.4,45.97 25.4,46.55 JP1.VBUS1
  Bottom 0.305: v27.69,45.47 27.69,41.15 v23.11,36.58 19.3,32.77 v19.3,24.38 19.3,21.18 v20.55,19.94
  pour Top: 20.07,20.57 20.7,21.21 20.95,21.21 20.95,20.57 21.08,20.45 21.59,20.45 21.72,20.57 21.72,21.21 22.48,21.21 22.48,20.32 21.59,19.43 21.59,18.29 20.07,18.29
5V1  (via drill 0.51)
  Top 0.254: U1.15 52.17,37.4 C6.2 | R24.2 v52.32,24.38
  Top 0.305: U1.15 55.31,37.4 v56.13,36.58 | v60.71,45.47 58.93,45.47 58.42,45.97 58.42,46.55 JP2.VBUS1
  Bottom 0.305: v60.71,45.47 60.71,41.15 v56.13,36.58 52.32,32.77 v52.32,24.38 52.32,21.18 v53.57,19.94
  pour Top: 53.09,20.57 53.72,21.21 53.98,21.21 53.98,20.57 54.1,20.45 54.61,20.45 54.74,20.57 54.74,21.21 55.5,21.21 55.5,20.32 54.61,19.43 54.61,18.29 53.09,18.29
5V2  (via drill 0.51)
  Top 0.254: U5.15 85.19,37.4 C16.2 | R36.2 v85.34,24.38
  Top 0.305: U5.15 88.33,37.4 v89.15,36.58 | v93.73,45.47 91.95,45.47 91.44,45.97 91.44,46.55 JP3.VBUS1
  Bottom 0.305: v93.73,45.47 93.73,41.15 v89.15,36.58 85.34,32.77 v85.34,24.38 85.34,21.18 v86.59,19.94
  pour Top: 86.11,20.57 86.74,21.21 87,21.21 87,20.57 87.12,20.45 87.63,20.45 87.76,20.57 87.76,21.21 88.52,21.21 88.52,20.32 87.63,19.43 87.63,18.29 86.11,18.29
5V3  (via drill 0.51)
  Top 0.254: U7.15 118.21,37.4 C23.2 | R48.2 v118.36,24.38
  Top 0.305: U7.15 121.35,37.4 v122.17,36.58 | v126.75,45.47 124.97,45.47 124.46,45.97 124.46,46.55 JP4.VBUS1
  Bottom 0.305: v126.75,45.47 126.75,41.15 v122.17,36.58 118.36,32.77 v118.36,24.38 118.36,21.18 v119.61,19.94
  pour Top: 119.13,20.57 119.76,21.21 120.02,21.21 120.02,20.57 120.14,20.45 120.65,20.45 120.78,20.57 120.78,21.21 121.54,21.21 121.54,20.32 120.65,19.43 120.65,18.29 119.13,18.29
5V4  (via drill 0.51)
  Top 0.254: U9.15 19.15,85.66 C30.2 | R60.2 v19.3,72.64
  Top 0.305: U9.15 22.29,85.66 v23.11,84.84 | v27.69,93.73 25.91,93.73 25.4,94.23 25.4,94.81 JP5.VBUS1
  Bottom 0.305: v27.69,93.73 27.69,89.41 v23.11,84.84 19.3,81.03 v19.3,72.64 19.3,69.44 v20.55,68.2
  pour Top: 20.07,68.83 20.7,69.47 20.95,69.47 20.95,68.83 21.08,68.71 21.59,68.71 21.72,68.83 21.72,69.47 22.48,69.47 22.48,68.58 21.59,67.69 21.59,66.55 20.07,66.55
5V5  (via drill 0.51)
  Top 0.254: U11.15 52.17,85.66 C37.2 | R72.2 v52.32,72.64
  Top 0.305: U11.15 55.31,85.66 v56.13,84.84 | v60.71,93.73 58.93,93.73 58.42,94.23 58.42,94.81 JP6.VBUS1
  Bottom 0.305: v60.71,93.73 60.71,89.41 v56.13,84.84 52.32,81.03 v52.32,72.64 52.32,69.44 v53.57,68.2